# EAGLE board SGP30 Breakout-Panel (EAGLE 9.6.0), part 1 of 5
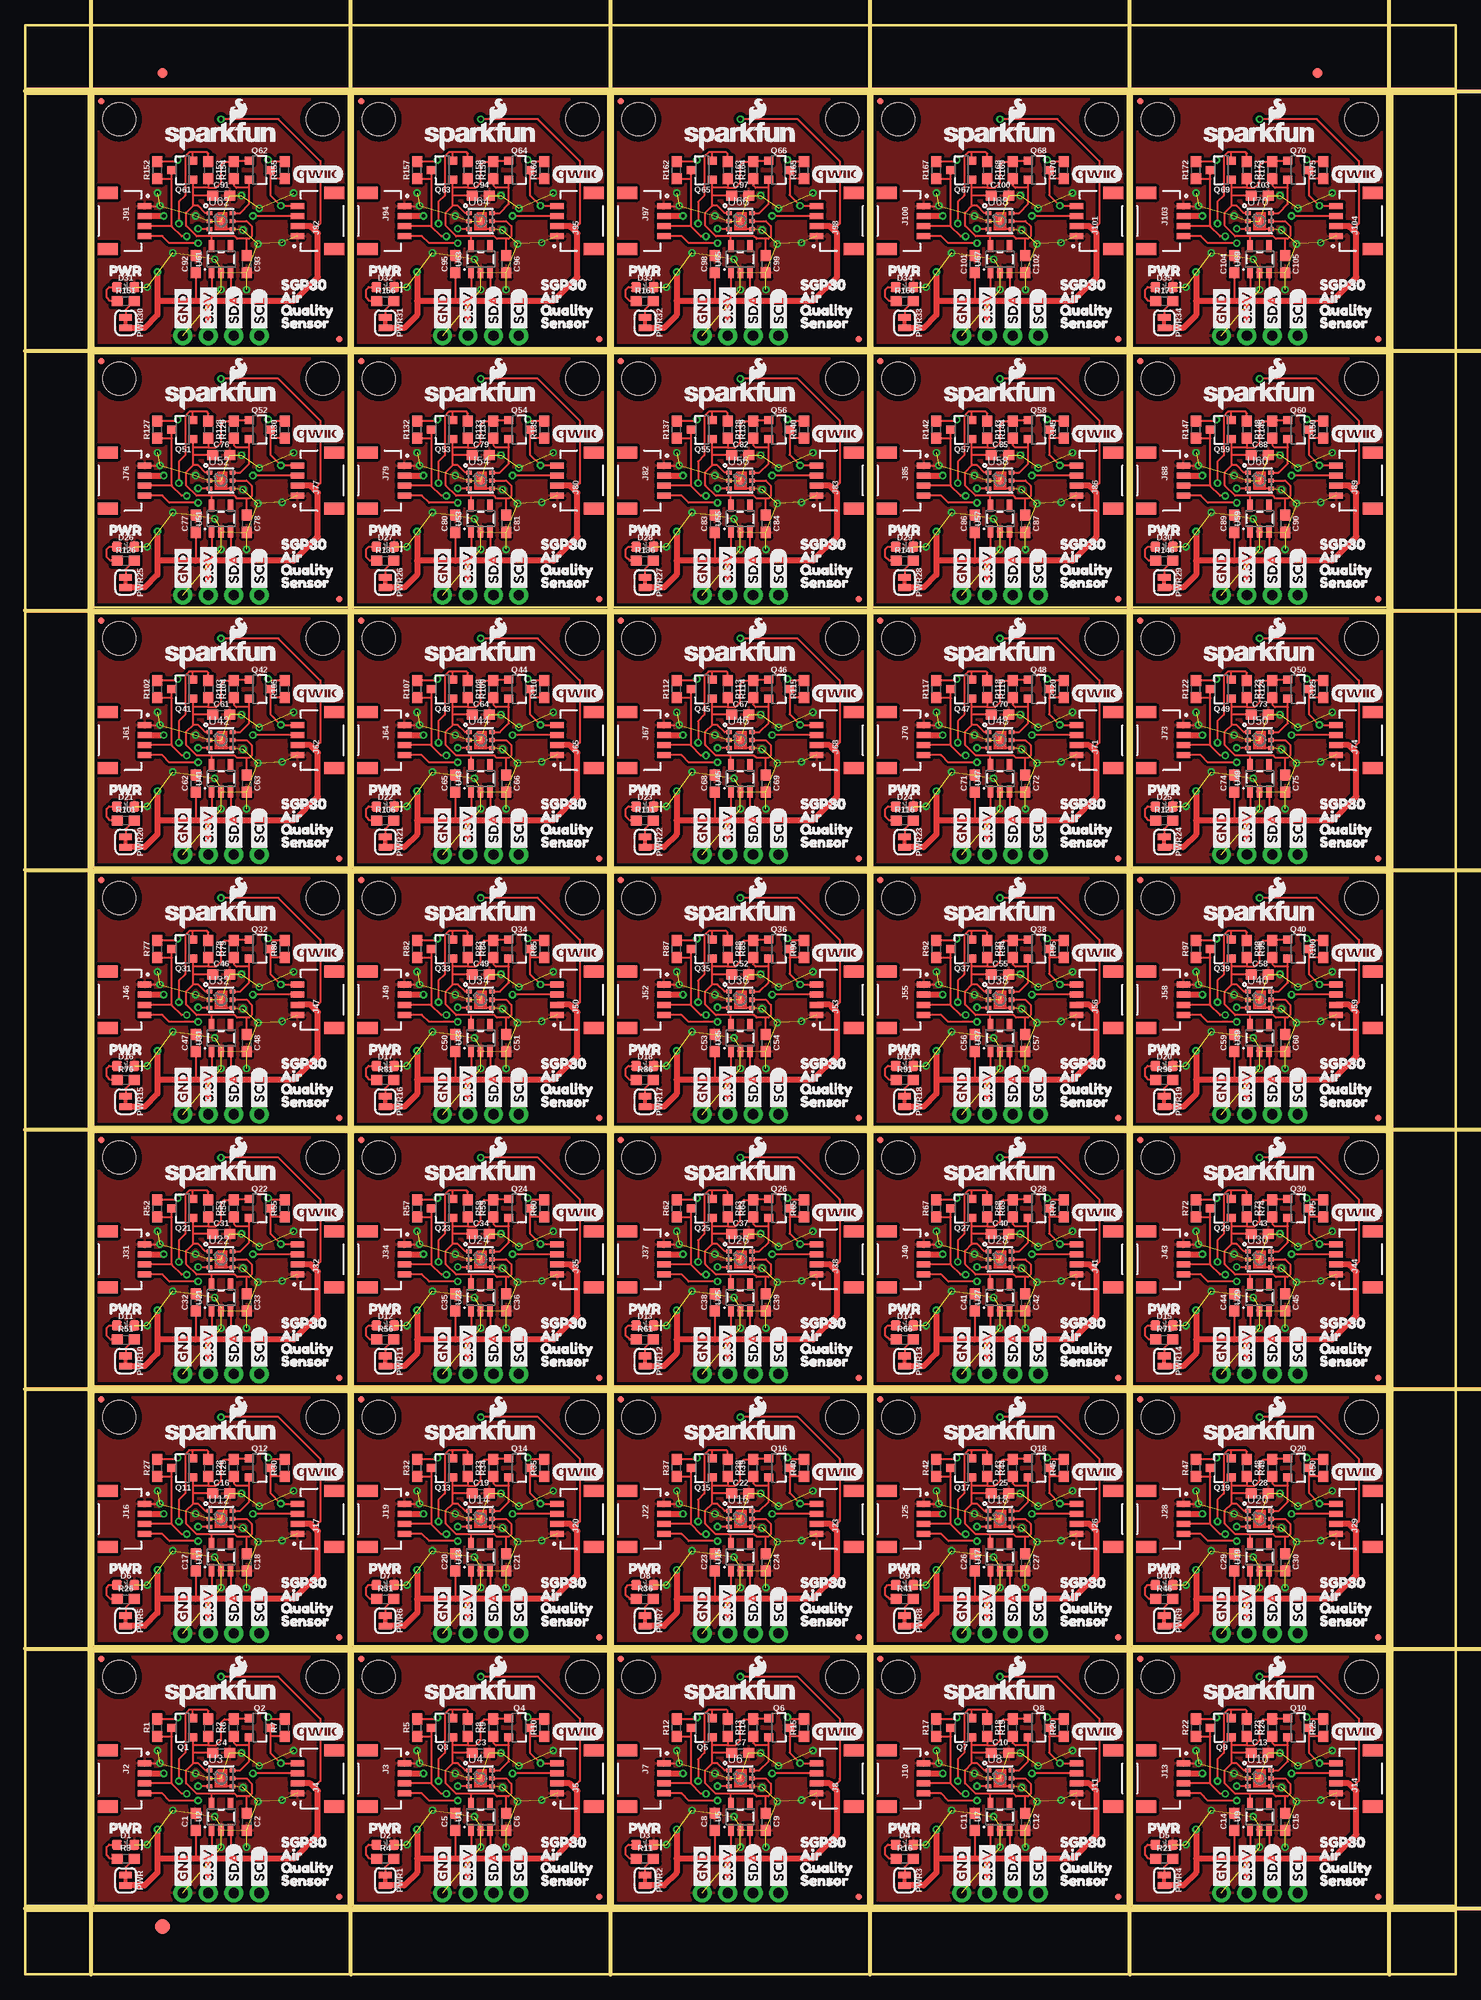
[diagram p0: board, top side]
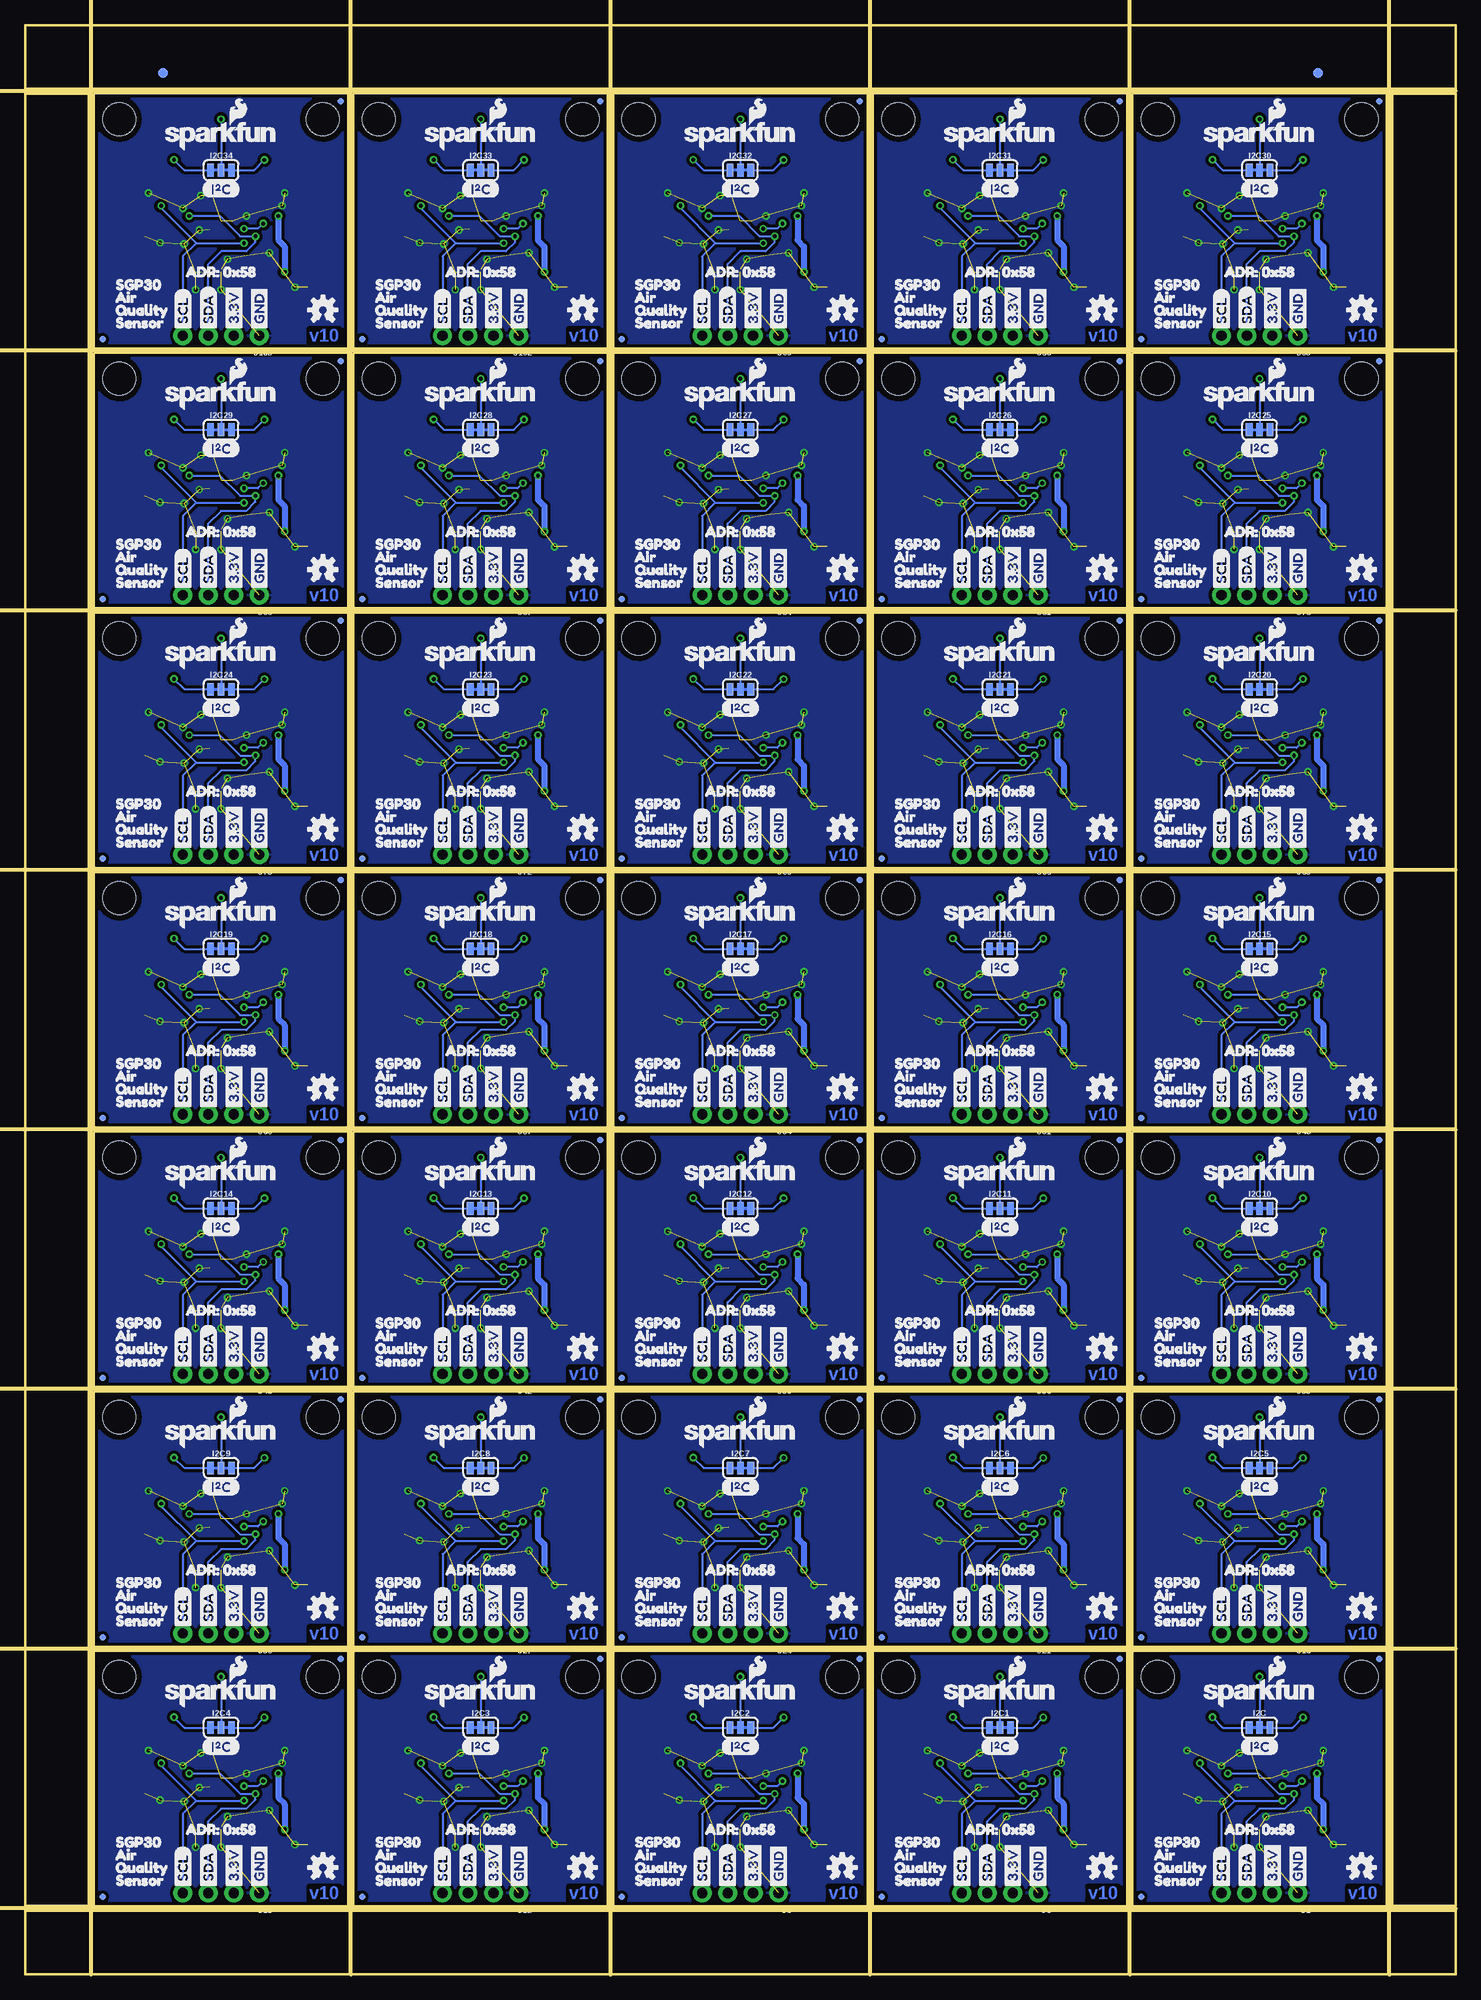
[diagram p1: board, bottom side, seen from below]

Size 142.75 x 194.56 mm. Coordinates in mm from the lower left corner, seen from the top.
Outline: 6.86,6.86 6.86,32.26 32.26,32.26 32.26,6.86 6.86,6.86
Outline: 32.77,6.86 32.77,32.26 58.17,32.26 58.17,6.86 32.77,6.86
Outline: 58.67,6.86 58.67,32.26 84.07,32.26 84.07,6.86 58.67,6.86
Outline: 84.58,6.86 84.58,32.26 109.98,32.26 109.98,6.86 84.58,6.86
Outline: 110.49,6.86 110.49,32.26 135.89,32.26 135.89,6.86 110.49,6.86
Outline: 6.86,32.77 6.86,58.17 32.26,58.17 32.26,32.77 6.86,32.77
Outline: 32.77,32.77 32.77,58.17 58.17,58.17 58.17,32.77 32.77,32.77
Outline: 58.67,32.77 58.67,58.17 84.07,58.17 84.07,32.77 58.67,32.77
Outline: 84.58,32.77 84.58,58.17 109.98,58.17 109.98,32.77 84.58,32.77
Outline: 110.49,32.77 110.49,58.17 135.89,58.17 135.89,32.77 110.49,32.77
Outline: 6.86,58.67 6.86,84.07 32.26,84.07 32.26,58.67 6.86,58.67
Outline: 32.77,58.67 32.77,84.07 58.17,84.07 58.17,58.67 32.77,58.67
Outline: 58.67,58.67 58.67,84.07 84.07,84.07 84.07,58.67 58.67,58.67
Outline: 84.58,58.67 84.58,84.07 109.98,84.07 109.98,58.67 84.58,58.67
Outline: 110.49,58.67 110.49,84.07 135.89,84.07 135.89,58.67 110.49,58.67
Outline: 6.86,84.58 6.86,109.98 32.26,109.98 32.26,84.58 6.86,84.58
Outline: 32.77,84.58 32.77,109.98 58.17,109.98 58.17,84.58 32.77,84.58
Outline: 58.67,84.58 58.67,109.98 84.07,109.98 84.07,84.58 58.67,84.58
Outline: 84.58,84.58 84.58,109.98 109.98,109.98 109.98,84.58 84.58,84.58
Outline: 110.49,84.58 110.49,109.98 135.89,109.98 135.89,84.58 110.49,84.58
Outline: 6.86,110.49 6.86,135.89 32.26,135.89 32.26,110.49 6.86,110.49
Outline: 32.77,110.49 32.77,135.89 58.17,135.89 58.17,110.49 32.77,110.49
Outline: 58.67,110.49 58.67,135.89 84.07,135.89 84.07,110.49 58.67,110.49
Outline: 84.58,110.49 84.58,135.89 109.98,135.89 109.98,110.49 84.58,110.49
Outline: 110.49,110.49 110.49,135.89 135.89,135.89 135.89,110.49 110.49,110.49
Outline: 6.86,136.4 6.86,161.8 32.26,161.8 32.26,136.4 6.86,136.4
Outline: 32.77,136.4 32.77,161.8 58.17,161.8 58.17,136.4 32.77,136.4
Outline: 58.67,136.4 58.67,161.8 84.07,161.8 84.07,136.4 58.67,136.4
Outline: 84.58,136.4 84.58,161.8 109.98,161.8 109.98,136.4 84.58,136.4
Outline: 110.49,136.4 110.49,161.8 135.89,161.8 135.89,136.4 110.49,136.4
Outline: 6.86,162.31 6.86,187.71 32.26,187.71 32.26,162.31 6.86,162.31
Outline: 32.77,162.31 32.77,187.71 58.17,187.71 58.17,162.31 32.77,162.31
Outline: 58.67,162.31 58.67,187.71 84.07,187.71 84.07,162.31 58.67,162.31
Outline: 84.58,162.31 84.58,187.71 109.98,187.71 109.98,162.31 84.58,162.31
Outline: 110.49,162.31 110.49,187.71 135.89,187.71 135.89,162.31 110.49,162.31
Outline: 0,6.35 142.75,6.35 142.75,0 0,0 0,6.35
Outline: 136.4,187.71 142.75,187.71 142.75,6.86 136.4,6.86 136.4,187.71
Outline: 0,194.56 142.75,194.56 142.75,188.21 0,188.21 0,194.56
Outline: 0,187.71 6.35,187.71 6.35,6.86 0,6.86 0,187.71
Copper layers (1*16): Top 0.035mm / dielectric 1.5mm / Bottom 0.035mm
Design rules "SGP30": minimum track width 7mil, minimum drill 15mil, track to track 7mil, track to pad 7mil, pad to pad 7mil, via to via 7mil, smd to smd 7mil, copper to edge 7mil, drill to drill 7mil, minimum pad ring 7mil, minimum via ring 7mil, stop-mask expansion 4mil, vias tented up to drill 25mil, thermal gap 10mil
Milling: 14 lines

## Footprints (pad centres in the part's own frame; a part is rotated, then mirrored left to right if it is on the bottom)
0603 = smd 1.1 x 1: 1 -0.85,0; 2 0.85,0
LED-0603 = smd 1 x 1: A -0.877,0; C 0.877,0
FIDUCIAL-1X2 = smd 1 x 1: 1 0,0
FIDUCIAL-1.5X3 = smd 1.5 x 1.5: 1 0,0
SMT-JUMPER_3_2-NC_TRACE_SILK = smd 0.66 x 1.27: 1 -1.041,0; 2 0,0; 3 1.041,0
1X04_NO_SILK = drill 1.016 pad 1.88: 1 0,0; 2 2.54,0; 3 5.08,0; 4 7.62,0
JST04_1MM_RA = smd 0.6 x 1.35: 1 -1.5,0; 2 -0.5,0; 3 0.5,0; 4 1.5,0 | smd 1.2 x 2: NC1 2.8,-3.675; NC2 -2.8,-3.675
MICRO-FIDUCIAL = smd 0.635 x 0.635: 1 0,0
STAND-OFF = hole 3.302: 0,0
SMT-JUMPER_2_NC_TRACE_SILK = smd 0.66 x 1.27: 1 -0.521,0; 2 0.521,0
SOT23-3 = smd 0.8 x 0.9: 1 -0.95,-1; 2 0.95,-1; 3 0,1.1
SOT23-5 = smd 0.55 x 1.2: 1 -0.95,-1.3; 2 0,-1.3; 3 0.95,-1.3; 4 0.95,1.3; 5 -0.95,1.3
SGP30 = smd 0.55 x 0.4: 1 -1.15,0.8; 2 -1.15,0; 3 -1.15,-0.8; 4 1.15,-0.8; 5 1.15,0; 6 1.15,0.8 | smd 0.305 x 0.61: DIEPAD 0,0

## Placement (x,y rotation side)
C1  1.0uF  [0603]  17.02,15.24 90 top
C2  1.0uF  [0603]  22.1,15.24 270 top
C3  0.1uF  [0603]  45.47,22.1 0 top
C4  0.1uF  [0603]  19.56,22.1 0 top
C5  1.0uF  [0603]  42.93,15.24 90 top
C6  1.0uF  [0603]  48.01,15.24 270 top
C7  0.1uF  [0603]  71.37,22.1 0 top
C8  1.0uF  [0603]  68.83,15.24 90 top
C9  1.0uF  [0603]  73.91,15.24 270 top
C10  0.1uF  [0603]  97.28,22.1 0 top
C11  1.0uF  [0603]  94.74,15.24 90 top
C12  1.0uF  [0603]  99.82,15.24 270 top
C13  0.1uF  [0603]  123.19,22.1 0 top
C14  1.0uF  [0603]  120.65,15.24 90 top
C15  1.0uF  [0603]  125.73,15.24 270 top
C16  0.1uF  [0603]  19.56,48.01 0 top
C17  1.0uF  [0603]  17.02,41.15 90 top
C18  1.0uF  [0603]  22.1,41.15 270 top
C19  0.1uF  [0603]  45.47,48.01 0 top
C20  1.0uF  [0603]  42.93,41.15 90 top
C21  1.0uF  [0603]  48.01,41.15 270 top
C22  0.1uF  [0603]  71.37,48.01 0 top
C23  1.0uF  [0603]  68.83,41.15 90 top
C24  1.0uF  [0603]  73.91,41.15 270 top
C25  0.1uF  [0603]  97.28,48.01 0 top
C26  1.0uF  [0603]  94.74,41.15 90 top
C27  1.0uF  [0603]  99.82,41.15 270 top
C28  0.1uF  [0603]  123.19,48.01 0 top
C29  1.0uF  [0603]  120.65,41.15 90 top
C30  1.0uF  [0603]  125.73,41.15 270 top
C31  0.1uF  [0603]  19.56,73.91 0 top
C32  1.0uF  [0603]  17.02,67.06 90 top
C33  1.0uF  [0603]  22.1,67.06 270 top
C34  0.1uF  [0603]  45.47,73.91 0 top
C35  1.0uF  [0603]  42.93,67.06 90 top
C36  1.0uF  [0603]  48.01,67.06 270 top
C37  0.1uF  [0603]  71.37,73.91 0 top
C38  1.0uF  [0603]  68.83,67.06 90 top
C39  1.0uF  [0603]  73.91,67.06 270 top
C40  0.1uF  [0603]  97.28,73.91 0 top
C41  1.0uF  [0603]  94.74,67.06 90 top
C42  1.0uF  [0603]  99.82,67.06 270 top
C43  0.1uF  [0603]  123.19,73.91 0 top
C44  1.0uF  [0603]  120.65,67.06 90 top
C45  1.0uF  [0603]  125.73,67.06 270 top
C46  0.1uF  [0603]  19.56,99.82 0 top
C47  1.0uF  [0603]  17.02,92.96 90 top
C48  1.0uF  [0603]  22.1,92.96 270 top
C49  0.1uF  [0603]  45.47,99.82 0 top
C50  1.0uF  [0603]  42.93,92.96 90 top
C51  1.0uF  [0603]  48.01,92.96 270 top
C52  0.1uF  [0603]  71.37,99.82 0 top
C53  1.0uF  [0603]  68.83,92.96 90 top
C54  1.0uF  [0603]  73.91,92.96 270 top
C55  0.1uF  [0603]  97.28,99.82 0 top
C56  1.0uF  [0603]  94.74,92.96 90 top
C57  1.0uF  [0603]  99.82,92.96 270 top
C58  0.1uF  [0603]  123.19,99.82 0 top
C59  1.0uF  [0603]  120.65,92.96 90 top
C60  1.0uF  [0603]  125.73,92.96 270 top
C61  0.1uF  [0603]  19.56,125.73 0 top
C62  1.0uF  [0603]  17.02,118.87 90 top
C63  1.0uF  [0603]  22.1,118.87 270 top
C64  0.1uF  [0603]  45.47,125.73 0 top
C65  1.0uF  [0603]  42.93,118.87 90 top
C66  1.0uF  [0603]  48.01,118.87 270 top
C67  0.1uF  [0603]  71.37,125.73 0 top
C68  1.0uF  [0603]  68.83,118.87 90 top
C69  1.0uF  [0603]  73.91,118.87 270 top
C70  0.1uF  [0603]  97.28,125.73 0 top
C71  1.0uF  [0603]  94.74,118.87 90 top
C72  1.0uF  [0603]  99.82,118.87 270 top
C73  0.1uF  [0603]  123.19,125.73 0 top
C74  1.0uF  [0603]  120.65,118.87 90 top
C75  1.0uF  [0603]  125.73,118.87 270 top
C76  0.1uF  [0603]  19.56,151.64 0 top
C77  1.0uF  [0603]  17.02,144.78 90 top
C78  1.0uF  [0603]  22.1,144.78 270 top
C79  0.1uF  [0603]  45.47,151.64 0 top
C80  1.0uF  [0603]  42.93,144.78 90 top
C81  1.0uF  [0603]  48.01,144.78 270 top
C82  0.1uF  [0603]  71.37,151.64 0 top
C83  1.0uF  [0603]  68.83,144.78 90 top
C84  1.0uF  [0603]  73.91,144.78 270 top
C85  0.1uF  [0603]  97.28,151.64 0 top
C86  1.0uF  [0603]  94.74,144.78 90 top
C87  1.0uF  [0603]  99.82,144.78 270 top
C88  0.1uF  [0603]  123.19,151.64 0 top
C89  1.0uF  [0603]  120.65,144.78 90 top
C90  1.0uF  [0603]  125.73,144.78 270 top
C91  0.1uF  [0603]  19.56,177.55 0 top
C92  1.0uF  [0603]  17.02,170.69 90 top
C93  1.0uF  [0603]  22.1,170.69 270 top
C94  0.1uF  [0603]  45.47,177.55 0 top
C95  1.0uF  [0603]  42.93,170.69 90 top
C96  1.0uF  [0603]  48.01,170.69 270 top
C97  0.1uF  [0603]  71.37,177.55 0 top
C98  1.0uF  [0603]  68.83,170.69 90 top
C99  1.0uF  [0603]  73.91,170.69 270 top
C100  0.1uF  [0603]  97.28,177.55 0 top
C101  1.0uF  [0603]  94.74,170.69 90 top
C102  1.0uF  [0603]  99.82,170.69 270 top
C103  0.1uF  [0603]  123.19,177.55 0 top
C104  1.0uF  [0603]  120.65,170.69 90 top
C105  1.0uF  [0603]  125.73,170.69 270 top
D1  RED  [LED-0603]  10.03,12.95 0 top
D2  RED  [LED-0603]  35.94,12.95 0 top
D3  RED  [LED-0603]  61.85,12.95 0 top
D4  RED  [LED-0603]  87.76,12.95 0 top
D5  RED  [LED-0603]  113.67,12.95 0 top
D6  RED  [LED-0603]  10.03,38.86 0 top
D7  RED  [LED-0603]  35.94,38.86 0 top
D8  RED  [LED-0603]  61.85,38.86 0 top
D9  RED  [LED-0603]  87.76,38.86 0 top
D10  RED  [LED-0603]  113.67,38.86 0 top
D11  RED  [LED-0603]  10.03,64.77 0 top
D12  RED  [LED-0603]  35.94,64.77 0 top
D13  RED  [LED-0603]  61.85,64.77 0 top
D14  RED  [LED-0603]  87.76,64.77 0 top
D15  RED  [LED-0603]  113.67,64.77 0 top
D16  RED  [LED-0603]  10.03,90.68 0 top
D17  RED  [LED-0603]  35.94,90.68 0 top
D18  RED  [LED-0603]  61.85,90.68 0 top
D19  RED  [LED-0603]  87.76,90.68 0 top
D20  RED  [LED-0603]  113.67,90.68 0 top
D21  RED  [LED-0603]  10.03,116.59 0 top
D22  RED  [LED-0603]  35.94,116.59 0 top
D23  RED  [LED-0603]  61.85,116.59 0 top
D24  RED  [LED-0603]  87.76,116.59 0 top
D25  RED  [LED-0603]  113.67,116.59 0 top
D26  RED  [LED-0603]  10.03,142.49 0 top
D27  RED  [LED-0603]  35.94,142.49 0 top
D28  RED  [LED-0603]  61.85,142.49 0 top
D29  RED  [LED-0603]  87.76,142.49 0 top
D30  RED  [LED-0603]  113.67,142.49 0 top
D31  RED  [LED-0603]  10.03,168.4 0 top
D32  RED  [LED-0603]  35.94,168.4 0 top
D33  RED  [LED-0603]  61.85,168.4 0 top
D34  RED  [LED-0603]  87.76,168.4 0 top
D35  RED  [LED-0603]  113.67,168.4 0 top
E$1  [FIDUCIAL-1X2]  13.72,189.8 0 top
E$2  [FIDUCIAL-1X2]  13.72,189.8 0 bottom
E$3  [FIDUCIAL-1X2]  128.97,189.8 0 top
E$4  [FIDUCIAL-1X2]  128.97,189.8 0 bottom
E$5  [FIDUCIAL-1.5X3]  13.72,4.76 0 top
I2C  JUMPER-SMT_3_2-NC_TRACE_SILK  [SMT-JUMPER_3_2-NC_TRACE_SILK]  19.56,24.64 0 bottom
I2C1  JUMPER-SMT_3_2-NC_TRACE_SILK  [SMT-JUMPER_3_2-NC_TRACE_SILK]  45.47,24.64 0 bottom
I2C2  JUMPER-SMT_3_2-NC_TRACE_SILK  [SMT-JUMPER_3_2-NC_TRACE_SILK]  71.37,24.64 0 bottom
I2C3  JUMPER-SMT_3_2-NC_TRACE_SILK  [SMT-JUMPER_3_2-NC_TRACE_SILK]  97.28,24.64 0 bottom
I2C4  JUMPER-SMT_3_2-NC_TRACE_SILK  [SMT-JUMPER_3_2-NC_TRACE_SILK]  123.19,24.64 0 bottom
I2C5  JUMPER-SMT_3_2-NC_TRACE_SILK  [SMT-JUMPER_3_2-NC_TRACE_SILK]  19.56,50.55 0 bottom
I2C6  JUMPER-SMT_3_2-NC_TRACE_SILK  [SMT-JUMPER_3_2-NC_TRACE_SILK]  45.47,50.55 0 bottom
I2C7  JUMPER-SMT_3_2-NC_TRACE_SILK  [SMT-JUMPER_3_2-NC_TRACE_SILK]  71.37,50.55 0 bottom
I2C8  JUMPER-SMT_3_2-NC_TRACE_SILK  [SMT-JUMPER_3_2-NC_TRACE_SILK]  97.28,50.55 0 bottom
I2C9  JUMPER-SMT_3_2-NC_TRACE_SILK  [SMT-JUMPER_3_2-NC_TRACE_SILK]  123.19,50.55 0 bottom
I2C10  JUMPER-SMT_3_2-NC_TRACE_SILK  [SMT-JUMPER_3_2-NC_TRACE_SILK]  19.56,76.45 0 bottom
I2C11  JUMPER-SMT_3_2-NC_TRACE_SILK  [SMT-JUMPER_3_2-NC_TRACE_SILK]  45.47,76.45 0 bottom
I2C12  JUMPER-SMT_3_2-NC_TRACE_SILK  [SMT-JUMPER_3_2-NC_TRACE_SILK]  71.37,76.45 0 bottom
I2C13  JUMPER-SMT_3_2-NC_TRACE_SILK  [SMT-JUMPER_3_2-NC_TRACE_SILK]  97.28,76.45 0 bottom
I2C14  JUMPER-SMT_3_2-NC_TRACE_SILK  [SMT-JUMPER_3_2-NC_TRACE_SILK]  123.19,76.45 0 bottom
I2C15  JUMPER-SMT_3_2-NC_TRACE_SILK  [SMT-JUMPER_3_2-NC_TRACE_SILK]  19.56,102.36 0 bottom
I2C16  JUMPER-SMT_3_2-NC_TRACE_SILK  [SMT-JUMPER_3_2-NC_TRACE_SILK]  45.47,102.36 0 bottom
I2C17  JUMPER-SMT_3_2-NC_TRACE_SILK  [SMT-JUMPER_3_2-NC_TRACE_SILK]  71.37,102.36 0 bottom
I2C18  JUMPER-SMT_3_2-NC_TRACE_SILK  [SMT-JUMPER_3_2-NC_TRACE_SILK]  97.28,102.36 0 bottom
I2C19  JUMPER-SMT_3_2-NC_TRACE_SILK  [SMT-JUMPER_3_2-NC_TRACE_SILK]  123.19,102.36 0 bottom
I2C20  JUMPER-SMT_3_2-NC_TRACE_SILK  [SMT-JUMPER_3_2-NC_TRACE_SILK]  19.56,128.27 0 bottom
I2C21  JUMPER-SMT_3_2-NC_TRACE_SILK  [SMT-JUMPER_3_2-NC_TRACE_SILK]  45.47,128.27 0 bottom
I2C22  JUMPER-SMT_3_2-NC_TRACE_SILK  [SMT-JUMPER_3_2-NC_TRACE_SILK]  71.37,128.27 0 bottom
I2C23  JUMPER-SMT_3_2-NC_TRACE_SILK  [SMT-JUMPER_3_2-NC_TRACE_SILK]  97.28,128.27 0 bottom
I2C24  JUMPER-SMT_3_2-NC_TRACE_SILK  [SMT-JUMPER_3_2-NC_TRACE_SILK]  123.19,128.27 0 bottom
I2C25  JUMPER-SMT_3_2-NC_TRACE_SILK  [SMT-JUMPER_3_2-NC_TRACE_SILK]  19.56,154.18 0 bottom
I2C26  JUMPER-SMT_3_2-NC_TRACE_SILK  [SMT-JUMPER_3_2-NC_TRACE_SILK]  45.47,154.18 0 bottom
I2C27  JUMPER-SMT_3_2-NC_TRACE_SILK  [SMT-JUMPER_3_2-NC_TRACE_SILK]  71.37,154.18 0 bottom
I2C28  JUMPER-SMT_3_2-NC_TRACE_SILK  [SMT-JUMPER_3_2-NC_TRACE_SILK]  97.28,154.18 0 bottom
I2C29  JUMPER-SMT_3_2-NC_TRACE_SILK  [SMT-JUMPER_3_2-NC_TRACE_SILK]  123.19,154.18 0 bottom
I2C30  JUMPER-SMT_3_2-NC_TRACE_SILK  [SMT-JUMPER_3_2-NC_TRACE_SILK]  19.56,180.09 0 bottom
I2C31  JUMPER-SMT_3_2-NC_TRACE_SILK  [SMT-JUMPER_3_2-NC_TRACE_SILK]  45.47,180.09 0 bottom
I2C32  JUMPER-SMT_3_2-NC_TRACE_SILK  [SMT-JUMPER_3_2-NC_TRACE_SILK]  71.37,180.09 0 bottom
I2C33  JUMPER-SMT_3_2-NC_TRACE_SILK  [SMT-JUMPER_3_2-NC_TRACE_SILK]  97.28,180.09 0 bottom
I2C34  JUMPER-SMT_3_2-NC_TRACE_SILK  [SMT-JUMPER_3_2-NC_TRACE_SILK]  123.19,180.09 0 bottom
J1  [1X04_NO_SILK]  15.75,8.13 180 bottom
J2  QWIIC_RIGHT_ANGLE  [JST04_1MM_RA]  11.94,19.56 270 top
J3  QWIIC_RIGHT_ANGLE  [JST04_1MM_RA]  37.85,19.56 270 top
J4  QWIIC_RIGHT_ANGLE  [JST04_1MM_RA]  27.18,19.56 90 top
J5  QWIIC_RIGHT_ANGLE  [JST04_1MM_RA]  53.09,19.56 90 top
J6  [1X04_NO_SILK]  41.66,8.13 180 bottom
J7  QWIIC_RIGHT_ANGLE  [JST04_1MM_RA]  63.75,19.56 270 top
J8  QWIIC_RIGHT_ANGLE  [JST04_1MM_RA]  78.99,19.56 90 top
J9  [1X04_NO_SILK]  67.56,8.13 180 bottom
J10  QWIIC_RIGHT_ANGLE  [JST04_1MM_RA]  89.66,19.56 270 top
J11  QWIIC_RIGHT_ANGLE  [JST04_1MM_RA]  104.9,19.56 90 top
J12  [1X04_NO_SILK]  93.47,8.13 180 bottom
J13  QWIIC_RIGHT_ANGLE  [JST04_1MM_RA]  115.57,19.56 270 top
J14  QWIIC_RIGHT_ANGLE  [JST04_1MM_RA]  130.81,19.56 90 top
J15  [1X04_NO_SILK]  119.38,8.13 180 bottom
J16  QWIIC_RIGHT_ANGLE  [JST04_1MM_RA]  11.94,45.47 270 top
J17  QWIIC_RIGHT_ANGLE  [JST04_1MM_RA]  27.18,45.47 90 top
J18  [1X04_NO_SILK]  15.75,34.04 180 bottom
J19  QWIIC_RIGHT_ANGLE  [JST04_1MM_RA]  37.85,45.47 270 top
J20  QWIIC_RIGHT_ANGLE  [JST04_1MM_RA]  53.09,45.47 90 top
J21  [1X04_NO_SILK]  41.66,34.04 180 bottom
J22  QWIIC_RIGHT_ANGLE  [JST04_1MM_RA]  63.75,45.47 270 top
J23  QWIIC_RIGHT_ANGLE  [JST04_1MM_RA]  78.99,45.47 90 top
J24  [1X04_NO_SILK]  67.56,34.04 180 bottom
J25  QWIIC_RIGHT_ANGLE  [JST04_1MM_RA]  89.66,45.47 270 top
J26  QWIIC_RIGHT_ANGLE  [JST04_1MM_RA]  104.9,45.47 90 top
J27  [1X04_NO_SILK]  93.47,34.04 180 bottom
J28  QWIIC_RIGHT_ANGLE  [JST04_1MM_RA]  115.57,45.47 270 top
J29  QWIIC_RIGHT_ANGLE  [JST04_1MM_RA]  130.81,45.47 90 top
J30  [1X04_NO_SILK]  119.38,34.04 180 bottom
J31  QWIIC_RIGHT_ANGLE  [JST04_1MM_RA]  11.94,71.37 270 top
J32  QWIIC_RIGHT_ANGLE  [JST04_1MM_RA]  27.18,71.37 90 top
J33  [1X04_NO_SILK]  15.75,59.94 180 bottom
J34  QWIIC_RIGHT_ANGLE  [JST04_1MM_RA]  37.85,71.37 270 top
J35  QWIIC_RIGHT_ANGLE  [JST04_1MM_RA]  53.09,71.37 90 top
J36  [1X04_NO_SILK]  41.66,59.94 180 bottom
J37  QWIIC_RIGHT_ANGLE  [JST04_1MM_RA]  63.75,71.37 270 top
J38  QWIIC_RIGHT_ANGLE  [JST04_1MM_RA]  78.99,71.37 90 top
J39  [1X04_NO_SILK]  67.56,59.94 180 bottom
J40  QWIIC_RIGHT_ANGLE  [JST04_1MM_RA]  89.66,71.37 270 top
J41  QWIIC_RIGHT_ANGLE  [JST04_1MM_RA]  104.9,71.37 90 top
J42  [1X04_NO_SILK]  93.47,59.94 180 bottom
J43  QWIIC_RIGHT_ANGLE  [JST04_1MM_RA]  115.57,71.37 270 top
J44  QWIIC_RIGHT_ANGLE  [JST04_1MM_RA]  130.81,71.37 90 top
J45  [1X04_NO_SILK]  119.38,59.94 180 bottom
J46  QWIIC_RIGHT_ANGLE  [JST04_1MM_RA]  11.94,97.28 270 top
J47  QWIIC_RIGHT_ANGLE  [JST04_1MM_RA]  27.18,97.28 90 top
J48  [1X04_NO_SILK]  15.75,85.85 180 bottom
J49  QWIIC_RIGHT_ANGLE  [JST04_1MM_RA]  37.85,97.28 270 top
J50  QWIIC_RIGHT_ANGLE  [JST04_1MM_RA]  53.09,97.28 90 top
J51  [1X04_NO_SILK]  41.66,85.85 180 bottom
J52  QWIIC_RIGHT_ANGLE  [JST04_1MM_RA]  63.75,97.28 270 top
J53  QWIIC_RIGHT_ANGLE  [JST04_1MM_RA]  78.99,97.28 90 top
J54  [1X04_NO_SILK]  67.56,85.85 180 bottom
J55  QWIIC_RIGHT_ANGLE  [JST04_1MM_RA]  89.66,97.28 270 top
J56  QWIIC_RIGHT_ANGLE  [JST04_1MM_RA]  104.9,97.28 90 top
J57  [1X04_NO_SILK]  93.47,85.85 180 bottom
J58  QWIIC_RIGHT_ANGLE  [JST04_1MM_RA]  115.57,97.28 270 top
J59  QWIIC_RIGHT_ANGLE  [JST04_1MM_RA]  130.81,97.28 90 top
J60  [1X04_NO_SILK]  119.38,85.85 180 bottom
J61  QWIIC_RIGHT_ANGLE  [JST04_1MM_RA]  11.94,123.19 270 top
J62  QWIIC_RIGHT_ANGLE  [JST04_1MM_RA]  27.18,123.19 90 top
J63  [1X04_NO_SILK]  15.75,111.76 180 bottom
J64  QWIIC_RIGHT_ANGLE  [JST04_1MM_RA]  37.85,123.19 270 top
J65  QWIIC_RIGHT_ANGLE  [JST04_1MM_RA]  53.09,123.19 90 top
J66  [1X04_NO_SILK]  41.66,111.76 180 bottom
J67  QWIIC_RIGHT_ANGLE  [JST04_1MM_RA]  63.75,123.19 270 top
J68  QWIIC_RIGHT_ANGLE  [JST04_1MM_RA]  78.99,123.19 90 top
J69  [1X04_NO_SILK]  67.56,111.76 180 bottom
J70  QWIIC_RIGHT_ANGLE  [JST04_1MM_RA]  89.66,123.19 270 top
J71  QWIIC_RIGHT_ANGLE  [JST04_1MM_RA]  104.9,123.19 90 top
J72  [1X04_NO_SILK]  93.47,111.76 180 bottom
J73  QWIIC_RIGHT_ANGLE  [JST04_1MM_RA]  115.57,123.19 270 top
J74  QWIIC_RIGHT_ANGLE  [JST04_1MM_RA]  130.81,123.19 90 top
J75  [1X04_NO_SILK]  119.38,111.76 180 bottom
J76  QWIIC_RIGHT_ANGLE  [JST04_1MM_RA]  11.94,149.1 270 top
J77  QWIIC_RIGHT_ANGLE  [JST04_1MM_RA]  27.18,149.1 90 top
J78  [1X04_NO_SILK]  15.75,137.67 180 bottom
J79  QWIIC_RIGHT_ANGLE  [JST04_1MM_RA]  37.85,149.1 270 top
J80  QWIIC_RIGHT_ANGLE  [JST04_1MM_RA]  53.09,149.1 90 top
J81  [1X04_NO_SILK]  41.66,137.67 180 bottom
J82  QWIIC_RIGHT_ANGLE  [JST04_1MM_RA]  63.75,149.1 270 top
J83  QWIIC_RIGHT_ANGLE  [JST04_1MM_RA]  78.99,149.1 90 top
J84  [1X04_NO_SILK]  67.56,137.67 180 bottom
J85  QWIIC_RIGHT_ANGLE  [JST04_1MM_RA]  89.66,149.1 270 top
J86  QWIIC_RIGHT_ANGLE  [JST04_1MM_RA]  104.9,149.1 90 top
J87  [1X04_NO_SILK]  93.47,137.67 180 bottom
J88  QWIIC_RIGHT_ANGLE  [JST04_1MM_RA]  115.57,149.1 270 top
J89  QWIIC_RIGHT_ANGLE  [JST04_1MM_RA]  130.81,149.1 90 top
J90  [1X04_NO_SILK]  119.38,137.67 180 bottom
J91  QWIIC_RIGHT_ANGLE  [JST04_1MM_RA]  11.94,175.01 270 top
J92  QWIIC_RIGHT_ANGLE  [JST04_1MM_RA]  27.18,175.01 90 top
J93  [1X04_NO_SILK]  15.75,163.58 180 bottom
J94  QWIIC_RIGHT_ANGLE  [JST04_1MM_RA]  37.85,175.01 270 top
J95  QWIIC_RIGHT_ANGLE  [JST04_1MM_RA]  53.09,175.01 90 top
J96  [1X04_NO_SILK]  41.66,163.58 180 bottom
J97  QWIIC_RIGHT_ANGLE  [JST04_1MM_RA]  63.75,175.01 270 top
J98  QWIIC_RIGHT_ANGLE  [JST04_1MM_RA]  78.99,175.01 90 top
J99  [1X04_NO_SILK]  67.56,163.58 180 bottom
J100  QWIIC_RIGHT_ANGLE  [JST04_1MM_RA]  89.66,175.01 270 top
J101  QWIIC_RIGHT_ANGLE  [JST04_1MM_RA]  104.9,175.01 90 top
J102  [1X04_NO_SILK]  93.47,163.58 180 bottom
J103  QWIIC_RIGHT_ANGLE  [JST04_1MM_RA]  115.57,175.01 270 top
J104  QWIIC_RIGHT_ANGLE  [JST04_1MM_RA]  130.81,175.01 90 top
J105  [1X04_NO_SILK]  119.38,163.58 180 bottom
JP1  FIDUCIALUFIDUCIAL  [MICRO-FIDUCIAL]  7.62,31.5 0 bottom
JP2  FIDUCIALUFIDUCIAL  [MICRO-FIDUCIAL]  31.37,7.75 0 top
JP3  STAND-OFF  [STAND-OFF]  9.4,29.72 0 top
JP4  STAND-OFF  [STAND-OFF]  29.72,29.72 0 top
JP5  FIDUCIALUFIDUCIAL  [MICRO-FIDUCIAL]  31.37,7.75 0 bottom
JP6  FIDUCIALUFIDUCIAL  [MICRO-FIDUCIAL]  7.62,31.5 0 top
JP7  STAND-OFF  [STAND-OFF]  35.31,29.72 0 top
JP8  STAND-OFF  [STAND-OFF]  55.63,29.72 0 top
JP9  FIDUCIALUFIDUCIAL  [MICRO-FIDUCIAL]  57.28,7.75 0 top
JP10  FIDUCIALUFIDUCIAL  [MICRO-FIDUCIAL]  33.53,31.5 0 top
JP11  FIDUCIALUFIDUCIAL  [MICRO-FIDUCIAL]  33.53,31.5 0 bottom
JP12  FIDUCIALUFIDUCIAL  [MICRO-FIDUCIAL]  57.28,7.75 0 bottom
JP13  STAND-OFF  [STAND-OFF]  61.21,29.72 0 top
JP14  STAND-OFF  [STAND-OFF]  81.53,29.72 0 top
JP15  FIDUCIALUFIDUCIAL  [MICRO-FIDUCIAL]  83.19,7.75 0 top
JP16  FIDUCIALUFIDUCIAL  [MICRO-FIDUCIAL]  59.44,31.5 0 top
JP17  FIDUCIALUFIDUCIAL  [MICRO-FIDUCIAL]  59.44,31.5 0 bottom
JP18  FIDUCIALUFIDUCIAL  [MICRO-FIDUCIAL]  83.19,7.75 0 bottom
JP19  STAND-OFF  [STAND-OFF]  87.12,29.72 0 top
JP20  STAND-OFF  [STAND-OFF]  107.44,29.72 0 top
JP21  FIDUCIALUFIDUCIAL  [MICRO-FIDUCIAL]  109.09,7.75 0 top
JP22  FIDUCIALUFIDUCIAL  [MICRO-FIDUCIAL]  85.34,31.5 0 top
JP23  FIDUCIALUFIDUCIAL  [MICRO-FIDUCIAL]  85.34,31.5 0 bottom
JP24  FIDUCIALUFIDUCIAL  [MICRO-FIDUCIAL]  109.09,7.75 0 bottom
JP25  STAND-OFF  [STAND-OFF]  113.03,29.72 0 top
JP26  STAND-OFF  [STAND-OFF]  133.35,29.72 0 top
JP27  FIDUCIALUFIDUCIAL  [MICRO-FIDUCIAL]  135,7.75 0 top
JP28  FIDUCIALUFIDUCIAL  [MICRO-FIDUCIAL]  111.25,31.5 0 top
JP29  FIDUCIALUFIDUCIAL  [MICRO-FIDUCIAL]  111.25,31.5 0 bottom
JP30  FIDUCIALUFIDUCIAL  [MICRO-FIDUCIAL]  135,7.75 0 bottom
JP31  STAND-OFF  [STAND-OFF]  9.4,55.63 0 top
JP32  STAND-OFF  [STAND-OFF]  29.72,55.63 0 top
JP33  FIDUCIALUFIDUCIAL  [MICRO-FIDUCIAL]  31.37,33.66 0 top
JP34  FIDUCIALUFIDUCIAL  [MICRO-FIDUCIAL]  7.62,57.4 0 top
JP35  FIDUCIALUFIDUCIAL  [MICRO-FIDUCIAL]  7.62,57.4 0 bottom
JP36  FIDUCIALUFIDUCIAL  [MICRO-FIDUCIAL]  31.37,33.66 0 bottom
JP37  STAND-OFF  [STAND-OFF]  35.31,55.63 0 top
JP38  STAND-OFF  [STAND-OFF]  55.63,55.63 0 top
JP39  FIDUCIALUFIDUCIAL  [MICRO-FIDUCIAL]  57.28,33.66 0 top
JP40  FIDUCIALUFIDUCIAL  [MICRO-FIDUCIAL]  33.53,57.4 0 top
JP41  FIDUCIALUFIDUCIAL  [MICRO-FIDUCIAL]  33.53,57.4 0 bottom
JP42  FIDUCIALUFIDUCIAL  [MICRO-FIDUCIAL]  57.28,33.66 0 bottom
JP43  STAND-OFF  [STAND-OFF]  61.21,55.63 0 top
JP44  STAND-OFF  [STAND-OFF]  81.53,55.63 0 top
JP45  FIDUCIALUFIDUCIAL  [MICRO-FIDUCIAL]  83.19,33.66 0 top
JP46  FIDUCIALUFIDUCIAL  [MICRO-FIDUCIAL]  59.44,57.4 0 top
JP47  FIDUCIALUFIDUCIAL  [MICRO-FIDUCIAL]  59.44,57.4 0 bottom
JP48  FIDUCIALUFIDUCIAL  [MICRO-FIDUCIAL]  83.19,33.66 0 bottom
JP49  STAND-OFF  [STAND-OFF]  87.12,55.63 0 top
JP50  STAND-OFF  [STAND-OFF]  107.44,55.63 0 top
JP51  FIDUCIALUFIDUCIAL  [MICRO-FIDUCIAL]  109.09,33.66 0 top
JP52  FIDUCIALUFIDUCIAL  [MICRO-FIDUCIAL]  85.34,57.4 0 top
JP53  FIDUCIALUFIDUCIAL  [MICRO-FIDUCIAL]  85.34,57.4 0 bottom
JP54  FIDUCIALUFIDUCIAL  [MICRO-FIDUCIAL]  109.09,33.66 0 bottom
JP55  STAND-OFF  [STAND-OFF]  113.03,55.63 0 top
JP56  STAND-OFF  [STAND-OFF]  133.35,55.63 0 top
JP57  FIDUCIALUFIDUCIAL  [MICRO-FIDUCIAL]  135,33.66 0 top
JP58  FIDUCIALUFIDUCIAL  [MICRO-FIDUCIAL]  111.25,57.4 0 top
JP59  FIDUCIALUFIDUCIAL  [MICRO-FIDUCIAL]  111.25,57.4 0 bottom
JP60  FIDUCIALUFIDUCIAL  [MICRO-FIDUCIAL]  135,33.66 0 bottom
JP61  STAND-OFF  [STAND-OFF]  9.4,81.53 0 top
JP62  STAND-OFF  [STAND-OFF]  29.72,81.53 0 top
JP63  FIDUCIALUFIDUCIAL  [MICRO-FIDUCIAL]  31.37,59.56 0 top
JP64  FIDUCIALUFIDUCIAL  [MICRO-FIDUCIAL]  7.62,83.31 0 top
JP65  FIDUCIALUFIDUCIAL  [MICRO-FIDUCIAL]  7.62,83.31 0 bottom
JP66  FIDUCIALUFIDUCIAL  [MICRO-FIDUCIAL]  31.37,59.56 0 bottom
JP67  STAND-OFF  [STAND-OFF]  35.31,81.53 0 top
JP68  STAND-OFF  [STAND-OFF]  55.63,81.53 0 top
JP69  FIDUCIALUFIDUCIAL  [MICRO-FIDUCIAL]  57.28,59.56 0 top
JP70  FIDUCIALUFIDUCIAL  [MICRO-FIDUCIAL]  33.53,83.31 0 top
JP71  FIDUCIALUFIDUCIAL  [MICRO-FIDUCIAL]  33.53,83.31 0 bottom
JP72  FIDUCIALUFIDUCIAL  [MICRO-FIDUCIAL]  57.28,59.56 0 bottom
JP73  STAND-OFF  [STAND-OFF]  61.21,81.53 0 top
JP74  STAND-OFF  [STAND-OFF]  81.53,81.53 0 top
JP75  FIDUCIALUFIDUCIAL  [MICRO-FIDUCIAL]  83.19,59.56 0 top
JP76  FIDUCIALUFIDUCIAL  [MICRO-FIDUCIAL]  59.44,83.31 0 top
JP77  FIDUCIALUFIDUCIAL  [MICRO-FIDUCIAL]  59.44,83.31 0 bottom
JP78  FIDUCIALUFIDUCIAL  [MICRO-FIDUCIAL]  83.19,59.56 0 bottom
JP79  STAND-OFF  [STAND-OFF]  87.12,81.53 0 top
JP80  STAND-OFF  [STAND-OFF]  107.44,81.53 0 top
JP81  FIDUCIALUFIDUCIAL  [MICRO-FIDUCIAL]  109.09,59.56 0 top
JP82  FIDUCIALUFIDUCIAL  [MICRO-FIDUCIAL]  85.34,83.31 0 top
JP83  FIDUCIALUFIDUCIAL  [MICRO-FIDUCIAL]  85.34,83.31 0 bottom
JP84  FIDUCIALUFIDUCIAL  [MICRO-FIDUCIAL]  109.09,59.56 0 bottom
JP85  STAND-OFF  [STAND-OFF]  113.03,81.53 0 top
JP86  STAND-OFF  [STAND-OFF]  133.35,81.53 0 top
JP87  FIDUCIALUFIDUCIAL  [MICRO-FIDUCIAL]  135,59.56 0 top
JP88  FIDUCIALUFIDUCIAL  [MICRO-FIDUCIAL]  111.25,83.31 0 top
JP89  FIDUCIALUFIDUCIAL  [MICRO-FIDUCIAL]  111.25,83.31 0 bottom
JP90  FIDUCIALUFIDUCIAL  [MICRO-FIDUCIAL]  135,59.56 0 bottom
JP91  STAND-OFF  [STAND-OFF]  9.4,107.44 0 top
JP92  STAND-OFF  [STAND-OFF]  29.72,107.44 0 top
JP93  FIDUCIALUFIDUCIAL  [MICRO-FIDUCIAL]  31.37,85.47 0 top
JP94  FIDUCIALUFIDUCIAL  [MICRO-FIDUCIAL]  7.62,109.22 0 top
JP95  FIDUCIALUFIDUCIAL  [MICRO-FIDUCIAL]  7.62,109.22 0 bottom
JP96  FIDUCIALUFIDUCIAL  [MICRO-FIDUCIAL]  31.37,85.47 0 bottom
JP97  STAND-OFF  [STAND-OFF]  35.31,107.44 0 top
JP98  STAND-OFF  [STAND-OFF]  55.63,107.44 0 top
JP99  FIDUCIALUFIDUCIAL  [MICRO-FIDUCIAL]  57.28,85.47 0 top
JP100  FIDUCIALUFIDUCIAL  [MICRO-FIDUCIAL]  33.53,109.22 0 top
JP101  FIDUCIALUFIDUCIAL  [MICRO-FIDUCIAL]  33.53,109.22 0 bottom
JP102  FIDUCIALUFIDUCIAL  [MICRO-FIDUCIAL]  57.28,85.47 0 bottom
JP103  STAND-OFF  [STAND-OFF]  61.21,107.44 0 top
JP104  STAND-OFF  [STAND-OFF]  81.53,107.44 0 top
JP105  FIDUCIALUFIDUCIAL  [MICRO-FIDUCIAL]  83.19,85.47 0 top
JP106  FIDUCIALUFIDUCIAL  [MICRO-FIDUCIAL]  59.44,109.22 0 top
JP107  FIDUCIALUFIDUCIAL  [MICRO-FIDUCIAL]  59.44,109.22 0 bottom
JP108  FIDUCIALUFIDUCIAL  [MICRO-FIDUCIAL]  83.19,85.47 0 bottom
JP109  STAND-OFF  [STAND-OFF]  87.12,107.44 0 top
JP110  STAND-OFF  [STAND-OFF]  107.44,107.44 0 top
JP111  FIDUCIALUFIDUCIAL  [MICRO-FIDUCIAL]  109.09,85.47 0 top
JP112  FIDUCIALUFIDUCIAL  [MICRO-FIDUCIAL]  85.34,109.22 0 top
JP113  FIDUCIALUFIDUCIAL  [MICRO-FIDUCIAL]  85.34,109.22 0 bottom
JP114  FIDUCIALUFIDUCIAL  [MICRO-FIDUCIAL]  109.09,85.47 0 bottom
JP115  STAND-OFF  [STAND-OFF]  113.03,107.44 0 top
JP116  STAND-OFF  [STAND-OFF]  133.35,107.44 0 top
JP117  FIDUCIALUFIDUCIAL  [MICRO-FIDUCIAL]  135,85.47 0 top
JP118  FIDUCIALUFIDUCIAL  [MICRO-FIDUCIAL]  111.25,109.22 0 top
JP119  FIDUCIALUFIDUCIAL  [MICRO-FIDUCIAL]  111.25,109.22 0 bottom
JP120  FIDUCIALUFIDUCIAL  [MICRO-FIDUCIAL]  135,85.47 0 bottom
JP121  STAND-OFF  [STAND-OFF]  9.4,133.35 0 top
JP122  STAND-OFF  [STAND-OFF]  29.72,133.35 0 top
JP123  FIDUCIALUFIDUCIAL  [MICRO-FIDUCIAL]  31.37,111.38 0 top
JP124  FIDUCIALUFIDUCIAL  [MICRO-FIDUCIAL]  7.62,135.13 0 top
JP125  FIDUCIALUFIDUCIAL  [MICRO-FIDUCIAL]  7.62,135.13 0 bottom
JP126  FIDUCIALUFIDUCIAL  [MICRO-FIDUCIAL]  31.37,111.38 0 bottom
JP127  STAND-OFF  [STAND-OFF]  35.31,133.35 0 top
JP128  STAND-OFF  [STAND-OFF]  55.63,133.35 0 top
JP129  FIDUCIALUFIDUCIAL  [MICRO-FIDUCIAL]  57.28,111.38 0 top
JP130  FIDUCIALUFIDUCIAL  [MICRO-FIDUCIAL]  33.53,135.13 0 top
JP131  FIDUCIALUFIDUCIAL  [MICRO-FIDUCIAL]  33.53,135.13 0 bottom
JP132  FIDUCIALUFIDUCIAL  [MICRO-FIDUCIAL]  57.28,111.38 0 bottom
JP133  STAND-OFF  [STAND-OFF]  61.21,133.35 0 top
JP134  STAND-OFF  [STAND-OFF]  81.53,133.35 0 top
JP135  FIDUCIALUFIDUCIAL  [MICRO-FIDUCIAL]  83.19,111.38 0 top
JP136  FIDUCIALUFIDUCIAL  [MICRO-FIDUCIAL]  59.44,135.13 0 top
JP137  FIDUCIALUFIDUCIAL  [MICRO-FIDUCIAL]  59.44,135.13 0 bottom
JP138  FIDUCIALUFIDUCIAL  [MICRO-FIDUCIAL]  83.19,111.38 0 bottom
JP139  STAND-OFF  [STAND-OFF]  87.12,133.35 0 top
JP140  STAND-OFF  [STAND-OFF]  107.44,133.35 0 top
JP141  FIDUCIALUFIDUCIAL  [MICRO-FIDUCIAL]  109.09,111.38 0 top
JP142  FIDUCIALUFIDUCIAL  [MICRO-FIDUCIAL]  85.34,135.13 0 top
JP143  FIDUCIALUFIDUCIAL  [MICRO-FIDUCIAL]  85.34,135.13 0 bottom
JP144  FIDUCIALUFIDUCIAL  [MICRO-FIDUCIAL]  109.09,111.38 0 bottom
JP145  STAND-OFF  [STAND-OFF]  113.03,133.35 0 top
JP146  STAND-OFF  [STAND-OFF]  133.35,133.35 0 top
JP147  FIDUCIALUFIDUCIAL  [MICRO-FIDUCIAL]  135,111.38 0 top
JP148  FIDUCIALUFIDUCIAL  [MICRO-FIDUCIAL]  111.25,135.13 0 top
JP149  FIDUCIALUFIDUCIAL  [MICRO-FIDUCIAL]  111.25,135.13 0 bottom
JP150  FIDUCIALUFIDUCIAL  [MICRO-FIDUCIAL]  135,111.38 0 bottom
JP151  STAND-OFF  [STAND-OFF]  9.4,159.26 0 top
JP152  STAND-OFF  [STAND-OFF]  29.72,159.26 0 top
JP153  FIDUCIALUFIDUCIAL  [MICRO-FIDUCIAL]  31.37,137.29 0 top
JP154  FIDUCIALUFIDUCIAL  [MICRO-FIDUCIAL]  7.62,161.04 0 top
JP155  FIDUCIALUFIDUCIAL  [MICRO-FIDUCIAL]  7.62,161.04 0 bottom
JP156  FIDUCIALUFIDUCIAL  [MICRO-FIDUCIAL]  31.37,137.29 0 bottom
JP157  STAND-OFF  [STAND-OFF]  35.31,159.26 0 top
JP158  STAND-OFF  [STAND-OFF]  55.63,159.26 0 top
JP159  FIDUCIALUFIDUCIAL  [MICRO-FIDUCIAL]  57.28,137.29 0 top
JP160  FIDUCIALUFIDUCIAL  [MICRO-FIDUCIAL]  33.53,161.04 0 top
JP161  FIDUCIALUFIDUCIAL  [MICRO-FIDUCIAL]  33.53,161.04 0 bottom
JP162  FIDUCIALUFIDUCIAL  [MICRO-FIDUCIAL]  57.28,137.29 0 bottom
JP163  STAND-OFF  [STAND-OFF]  61.21,159.26 0 top
JP164  STAND-OFF  [STAND-OFF]  81.53,159.26 0 top
JP165  FIDUCIALUFIDUCIAL  [MICRO-FIDUCIAL]  83.19,137.29 0 top
JP166  FIDUCIALUFIDUCIAL  [MICRO-FIDUCIAL]  59.44,161.04 0 top
JP167  FIDUCIALUFIDUCIAL  [MICRO-FIDUCIAL]  59.44,161.04 0 bottom
JP168  FIDUCIALUFIDUCIAL  [MICRO-FIDUCIAL]  83.19,137.29 0 bottom
JP169  STAND-OFF  [STAND-OFF]  87.12,159.26 0 top
JP170  STAND-OFF  [STAND-OFF]  107.44,159.26 0 top
JP171  FIDUCIALUFIDUCIAL  [MICRO-FIDUCIAL]  109.09,137.29 0 top
JP172  FIDUCIALUFIDUCIAL  [MICRO-FIDUCIAL]  85.34,161.04 0 top
JP173  FIDUCIALUFIDUCIAL  [MICRO-FIDUCIAL]  85.34,161.04 0 bottom
JP174  FIDUCIALUFIDUCIAL  [MICRO-FIDUCIAL]  109.09,137.29 0 bottom
JP175  STAND-OFF  [STAND-OFF]  113.03,159.26 0 top
JP176  STAND-OFF  [STAND-OFF]  133.35,159.26 0 top
JP177  FIDUCIALUFIDUCIAL  [MICRO-FIDUCIAL]  135,137.29 0 top
JP178  FIDUCIALUFIDUCIAL  [MICRO-FIDUCIAL]  111.25,161.04 0 top
JP179  FIDUCIALUFIDUCIAL  [MICRO-FIDUCIAL]  111.25,161.04 0 bottom
JP180  FIDUCIALUFIDUCIAL  [MICRO-FIDUCIAL]  135,137.29 0 bottom
JP181  STAND-OFF  [STAND-OFF]  9.4,185.17 0 top
JP182  STAND-OFF  [STAND-OFF]  29.72,185.17 0 top
JP183  FIDUCIALUFIDUCIAL  [MICRO-FIDUCIAL]  31.37,163.19 0 top
JP184  FIDUCIALUFIDUCIAL  [MICRO-FIDUCIAL]  7.62,186.94 0 top
JP185  FIDUCIALUFIDUCIAL  [MICRO-FIDUCIAL]  7.62,186.94 0 bottom
JP186  FIDUCIALUFIDUCIAL  [MICRO-FIDUCIAL]  31.37,163.19 0 bottom
JP187  STAND-OFF  [STAND-OFF]  35.31,185.17 0 top
JP188  STAND-OFF  [STAND-OFF]  55.63,185.17 0 top
JP189  FIDUCIALUFIDUCIAL  [MICRO-FIDUCIAL]  57.28,163.19 0 top
JP190  FIDUCIALUFIDUCIAL  [MICRO-FIDUCIAL]  33.53,186.94 0 top
JP191  FIDUCIALUFIDUCIAL  [MICRO-FIDUCIAL]  33.53,186.94 0 bottom
JP192  FIDUCIALUFIDUCIAL  [MICRO-FIDUCIAL]  57.28,163.19 0 bottom
JP193  STAND-OFF  [STAND-OFF]  61.21,185.17 0 top
JP194  STAND-OFF  [STAND-OFF]  81.53,185.17 0 top
JP195  FIDUCIALUFIDUCIAL  [MICRO-FIDUCIAL]  83.19,163.19 0 top
JP196  FIDUCIALUFIDUCIAL  [MICRO-FIDUCIAL]  59.44,186.94 0 top
JP197  FIDUCIALUFIDUCIAL  [MICRO-FIDUCIAL]  59.44,186.94 0 bottom
JP198  FIDUCIALUFIDUCIAL  [MICRO-FIDUCIAL]  83.19,163.19 0 bottom
JP199  STAND-OFF  [STAND-OFF]  87.12,185.17 0 top
JP200  STAND-OFF  [STAND-OFF]  107.44,185.17 0 top
JP201  FIDUCIALUFIDUCIAL  [MICRO-FIDUCIAL]  109.09,163.19 0 top
JP202  FIDUCIALUFIDUCIAL  [MICRO-FIDUCIAL]  85.34,186.94 0 top
JP203  FIDUCIALUFIDUCIAL  [MICRO-FIDUCIAL]  85.34,186.94 0 bottom
JP204  FIDUCIALUFIDUCIAL  [MICRO-FIDUCIAL]  109.09,163.19 0 bottom
JP205  STAND-OFF  [STAND-OFF]  113.03,185.17 0 top
JP206  STAND-OFF  [STAND-OFF]  133.35,185.17 0 top
JP207  FIDUCIALUFIDUCIAL  [MICRO-FIDUCIAL]  135,163.19 0 top
JP208  FIDUCIALUFIDUCIAL  [MICRO-FIDUCIAL]  111.25,186.94 0 top
JP209  FIDUCIALUFIDUCIAL  [MICRO-FIDUCIAL]  111.25,186.94 0 bottom
JP210  FIDUCIALUFIDUCIAL  [MICRO-FIDUCIAL]  135,163.19 0 bottom
LOGO1  REVISION  [REVISION]  31.5,-8.38 0 top  (outside the outline)
LOGO2  REVISION  [REVISION]  5.59,-8.38 0 top  (outside the outline)
LOGO3  SFE_LOGO_NAME_FLAME.1_INCH  [SFE_LOGO_NAME_FLAME_.1]  19.56,28.07 0 top
LOGO4  SFE_LOGO_NAME_FLAME.1_INCH  [SFE_LOGO_NAME_FLAME_.1]  19.56,28.07 0 bottom
LOGO5  OSHW-LOGOS  [OSHW-LOGO-S]  9.4,10.67 0 bottom
LOGO6  SFE_LOGO_NAME_FLAME.1_INCH  [SFE_LOGO_NAME_FLAME_.1]  45.47,28.07 0 top
LOGO7  SFE_LOGO_NAME_FLAME.1_INCH  [SFE_LOGO_NAME_FLAME_.1]  45.47,28.07 0 bottom
LOGO8  OSHW-LOGOS  [OSHW-LOGO-S]  35.31,10.67 0 bottom
LOGO9  REVISION  [REVISION]  57.4,-8.38 0 top  (outside the outline)
LOGO10  SFE_LOGO_NAME_FLAME.1_INCH  [SFE_LOGO_NAME_FLAME_.1]  71.37,28.07 0 top
LOGO11  SFE_LOGO_NAME_FLAME.1_INCH  [SFE_LOGO_NAME_FLAME_.1]  71.37,28.07 0 bottom
LOGO12  OSHW-LOGOS  [OSHW-LOGO-S]  61.21,10.67 0 bottom
LOGO13  REVISION  [REVISION]  83.31,-8.38 0 top  (outside the outline)
LOGO14  SFE_LOGO_NAME_FLAME.1_INCH  [SFE_LOGO_NAME_FLAME_.1]  97.28,28.07 0 top
LOGO15  SFE_LOGO_NAME_FLAME.1_INCH  [SFE_LOGO_NAME_FLAME_.1]  97.28,28.07 0 bottom
LOGO16  OSHW-LOGOS  [OSHW-LOGO-S]  87.12,10.67 0 bottom
LOGO17  REVISION  [REVISION]  109.22,-8.38 0 top  (outside the outline)
LOGO18  SFE_LOGO_NAME_FLAME.1_INCH  [SFE_LOGO_NAME_FLAME_.1]  123.19,28.07 0 top
LOGO19  SFE_LOGO_NAME_FLAME.1_INCH  [SFE_LOGO_NAME_FLAME_.1]  123.19,28.07 0 bottom
LOGO20  OSHW-LOGOS  [OSHW-LOGO-S]  113.03,10.67 0 bottom
LOGO21  REVISION  [REVISION]  5.59,17.53 0 top
LOGO22  SFE_LOGO_NAME_FLAME.1_INCH  [SFE_LOGO_NAME_FLAME_.1]  19.56,53.97 0 top
LOGO23  SFE_LOGO_NAME_FLAME.1_INCH  [SFE_LOGO_NAME_FLAME_.1]  19.56,53.97 0 bottom
LOGO24  OSHW-LOGOS  [OSHW-LOGO-S]  9.4,36.58 0 bottom
LOGO25  REVISION  [REVISION]  31.5,17.53 0 top
LOGO26  SFE_LOGO_NAME_FLAME.1_INCH  [SFE_LOGO_NAME_FLAME_.1]  45.47,53.97 0 top
LOGO27  SFE_LOGO_NAME_FLAME.1_INCH  [SFE_LOGO_NAME_FLAME_.1]  45.47,53.97 0 bottom
LOGO28  OSHW-LOGOS  [OSHW-LOGO-S]  35.31,36.58 0 bottom
LOGO29  REVISION  [REVISION]  57.4,17.53 0 top
LOGO30  SFE_LOGO_NAME_FLAME.1_INCH  [SFE_LOGO_NAME_FLAME_.1]  71.37,53.97 0 top
LOGO31  SFE_LOGO_NAME_FLAME.1_INCH  [SFE_LOGO_NAME_FLAME_.1]  71.37,53.97 0 bottom
LOGO32  OSHW-LOGOS  [OSHW-LOGO-S]  61.21,36.58 0 bottom
LOGO33  REVISION  [REVISION]  83.31,17.53 0 top
LOGO34  SFE_LOGO_NAME_FLAME.1_INCH  [SFE_LOGO_NAME_FLAME_.1]  97.28,53.97 0 top
LOGO35  SFE_LOGO_NAME_FLAME.1_INCH  [SFE_LOGO_NAME_FLAME_.1]  97.28,53.97 0 bottom
LOGO36  OSHW-LOGOS  [OSHW-LOGO-S]  87.12,36.58 0 bottom
LOGO37  REVISION  [REVISION]  109.22,17.53 0 top
LOGO38  SFE_LOGO_NAME_FLAME.1_INCH  [SFE_LOGO_NAME_FLAME_.1]  123.19,53.97 0 top
LOGO39  SFE_LOGO_NAME_FLAME.1_INCH  [SFE_LOGO_NAME_FLAME_.1]  123.19,53.97 0 bottom
LOGO40  OSHW-LOGOS  [OSHW-LOGO-S]  113.03,36.58 0 bottom
LOGO41  REVISION  [REVISION]  5.59,43.43 0 top
LOGO42  SFE_LOGO_NAME_FLAME.1_INCH  [SFE_LOGO_NAME_FLAME_.1]  19.56,79.88 0 top
LOGO43  SFE_LOGO_NAME_FLAME.1_INCH  [SFE_LOGO_NAME_FLAME_.1]  19.56,79.88 0 bottom
LOGO44  OSHW-LOGOS  [OSHW-LOGO-S]  9.4,62.48 0 bottom
LOGO45  REVISION  [REVISION]  31.5,43.43 0 top
LOGO46  SFE_LOGO_NAME_FLAME.1_INCH  [SFE_LOGO_NAME_FLAME_.1]  45.47,79.88 0 top
LOGO47  SFE_LOGO_NAME_FLAME.1_INCH  [SFE_LOGO_NAME_FLAME_.1]  45.47,79.88 0 bottom
LOGO48  OSHW-LOGOS  [OSHW-LOGO-S]  35.31,62.48 0 bottom
LOGO49  REVISION  [REVISION]  57.4,43.43 0 top
LOGO50  SFE_LOGO_NAME_FLAME.1_INCH  [SFE_LOGO_NAME_FLAME_.1]  71.37,79.88 0 top
LOGO51  SFE_LOGO_NAME_FLAME.1_INCH  [SFE_LOGO_NAME_FLAME_.1]  71.37,79.88 0 bottom
LOGO52  OSHW-LOGOS  [OSHW-LOGO-S]  61.21,62.48 0 bottom
LOGO53  REVISION  [REVISION]  83.31,43.43 0 top
LOGO54  SFE_LOGO_NAME_FLAME.1_INCH  [SFE_LOGO_NAME_FLAME_.1]  97.28,79.88 0 top
LOGO55  SFE_LOGO_NAME_FLAME.1_INCH  [SFE_LOGO_NAME_FLAME_.1]  97.28,79.88 0 bottom
LOGO56  OSHW-LOGOS  [OSHW-LOGO-S]  87.12,62.48 0 bottom
LOGO57  REVISION  [REVISION]  109.22,43.43 0 top
LOGO58  SFE_LOGO_NAME_FLAME.1_INCH  [SFE_LOGO_NAME_FLAME_.1]  123.19,79.88 0 top
LOGO59  SFE_LOGO_NAME_FLAME.1_INCH  [SFE_LOGO_NAME_FLAME_.1]  123.19,79.88 0 bottom
LOGO60  OSHW-LOGOS  [OSHW-LOGO-S]  113.03,62.48 0 bottom
LOGO61  REVISION  [REVISION]  5.59,69.34 0 top
LOGO62  SFE_LOGO_NAME_FLAME.1_INCH  [SFE_LOGO_NAME_FLAME_.1]  19.56,105.79 0 top
LOGO63  SFE_LOGO_NAME_FLAME.1_INCH  [SFE_LOGO_NAME_FLAME_.1]  19.56,105.79 0 bottom
LOGO64  OSHW-LOGOS  [OSHW-LOGO-S]  9.4,88.39 0 bottom
LOGO65  REVISION  [REVISION]  31.5,69.34 0 top
LOGO66  SFE_LOGO_NAME_FLAME.1_INCH  [SFE_LOGO_NAME_FLAME_.1]  45.47,105.79 0 top
LOGO67  SFE_LOGO_NAME_FLAME.1_INCH  [SFE_LOGO_NAME_FLAME_.1]  45.47,105.79 0 bottom
LOGO68  OSHW-LOGOS  [OSHW-LOGO-S]  35.31,88.39 0 bottom
LOGO69  REVISION  [REVISION]  57.4,69.34 0 top
LOGO70  SFE_LOGO_NAME_FLAME.1_INCH  [SFE_LOGO_NAME_FLAME_.1]  71.37,105.79 0 top
LOGO71  SFE_LOGO_NAME_FLAME.1_INCH  [SFE_LOGO_NAME_FLAME_.1]  71.37,105.79 0 bottom
LOGO72  OSHW-LOGOS  [OSHW-LOGO-S]  61.21,88.39 0 bottom
LOGO73  REVISION  [REVISION]  83.31,69.34 0 top
LOGO74  SFE_LOGO_NAME_FLAME.1_INCH  [SFE_LOGO_NAME_FLAME_.1]  97.28,105.79 0 top
LOGO75  SFE_LOGO_NAME_FLAME.1_INCH  [SFE_LOGO_NAME_FLAME_.1]  97.28,105.79 0 bottom
LOGO76  OSHW-LOGOS  [OSHW-LOGO-S]  87.12,88.39 0 bottom
LOGO77  REVISION  [REVISION]  109.22,69.34 0 top
LOGO78  SFE_LOGO_NAME_FLAME.1_INCH  [SFE_LOGO_NAME_FLAME_.1]  123.19,105.79 0 top
LOGO79  SFE_LOGO_NAME_FLAME.1_INCH  [SFE_LOGO_NAME_FLAME_.1]  123.19,105.79 0 bottom
LOGO80  OSHW-LOGOS  [OSHW-LOGO-S]  113.03,88.39 0 bottom
LOGO81  REVISION  [REVISION]  5.59,95.25 0 top
LOGO82  SFE_LOGO_NAME_FLAME.1_INCH  [SFE_LOGO_NAME_FLAME_.1]  19.56,131.7 0 top
LOGO83  SFE_LOGO_NAME_FLAME.1_INCH  [SFE_LOGO_NAME_FLAME_.1]  19.56,131.7 0 bottom
LOGO84  OSHW-LOGOS  [OSHW-LOGO-S]  9.4,114.3 0 bottom
LOGO85  REVISION  [REVISION]  31.5,95.25 0 top
LOGO86  SFE_LOGO_NAME_FLAME.1_INCH  [SFE_LOGO_NAME_FLAME_.1]  45.47,131.7 0 top
LOGO87  SFE_LOGO_NAME_FLAME.1_INCH  [SFE_LOGO_NAME_FLAME_.1]  45.47,131.7 0 bottom
LOGO88  OSHW-LOGOS  [OSHW-LOGO-S]  35.31,114.3 0 bottom
LOGO89  REVISION  [REVISION]  57.4,95.25 0 top
LOGO90  SFE_LOGO_NAME_FLAME.1_INCH  [SFE_LOGO_NAME_FLAME_.1]  71.37,131.7 0 top
LOGO91  SFE_LOGO_NAME_FLAME.1_INCH  [SFE_LOGO_NAME_FLAME_.1]  71.37,131.7 0 bottom
LOGO92  OSHW-LOGOS  [OSHW-LOGO-S]  61.21,114.3 0 bottom
LOGO93  REVISION  [REVISION]  83.31,95.25 0 top
LOGO94  SFE_LOGO_NAME_FLAME.1_INCH  [SFE_LOGO_NAME_FLAME_.1]  97.28,131.7 0 top
LOGO95  SFE_LOGO_NAME_FLAME.1_INCH  [SFE_LOGO_NAME_FLAME_.1]  97.28,131.7 0 bottom
LOGO96  OSHW-LOGOS  [OSHW-LOGO-S]  87.12,114.3 0 bottom
LOGO97  REVISION  [REVISION]  109.22,95.25 0 top
LOGO98  SFE_LOGO_NAME_FLAME.1_INCH  [SFE_LOGO_NAME_FLAME_.1]  123.19,131.7 0 top
LOGO99  SFE_LOGO_NAME_FLAME.1_INCH  [SFE_LOGO_NAME_FLAME_.1]  123.19,131.7 0 bottom
LOGO100  OSHW-LOGOS  [OSHW-LOGO-S]  113.03,114.3 0 bottom
LOGO101  REVISION  [REVISION]  5.59,121.16 0 top
LOGO102  SFE_LOGO_NAME_FLAME.1_INCH  [SFE_LOGO_NAME_FLAME_.1]  19.56,157.61 0 top
LOGO103  SFE_LOGO_NAME_FLAME.1_INCH  [SFE_LOGO_NAME_FLAME_.1]  19.56,157.61 0 bottom
LOGO104  OSHW-LOGOS  [OSHW-LOGO-S]  9.4,140.21 0 bottom
LOGO105  REVISION  [REVISION]  31.5,121.16 0 top
LOGO106  SFE_LOGO_NAME_FLAME.1_INCH  [SFE_LOGO_NAME_FLAME_.1]  45.47,157.61 0 top
LOGO107  SFE_LOGO_NAME_FLAME.1_INCH  [SFE_LOGO_NAME_FLAME_.1]  45.47,157.61 0 bottom
LOGO108  OSHW-LOGOS  [OSHW-LOGO-S]  35.31,140.21 0 bottom
LOGO109  REVISION  [REVISION]  57.4,121.16 0 top
LOGO110  SFE_LOGO_NAME_FLAME.1_INCH  [SFE_LOGO_NAME_FLAME_.1]  71.37,157.61 0 top
LOGO111  SFE_LOGO_NAME_FLAME.1_INCH  [SFE_LOGO_NAME_FLAME_.1]  71.37,157.61 0 bottom
LOGO112  OSHW-LOGOS  [OSHW-LOGO-S]  61.21,140.21 0 bottom
LOGO113  REVISION  [REVISION]  83.31,121.16 0 top
LOGO114  SFE_LOGO_NAME_FLAME.1_INCH  [SFE_LOGO_NAME_FLAME_.1]  97.28,157.61 0 top
LOGO115  SFE_LOGO_NAME_FLAME.1_INCH  [SFE_LOGO_NAME_FLAME_.1]  97.28,157.61 0 bottom
LOGO116  OSHW-LOGOS  [OSHW-LOGO-S]  87.12,140.21 0 bottom
LOGO117  REVISION  [REVISION]  109.22,121.16 0 top
LOGO118  SFE_LOGO_NAME_FLAME.1_INCH  [SFE_LOGO_NAME_FLAME_.1]  123.19,157.61 0 top
LOGO119  SFE_LOGO_NAME_FLAME.1_INCH  [SFE_LOGO_NAME_FLAME_.1]  123.19,157.61 0 bottom
LOGO120  OSHW-LOGOS  [OSHW-LOGO-S]  113.03,140.21 0 bottom
LOGO121  REVISION  [REVISION]  5.59,147.07 0 top
LOGO122  SFE_LOGO_NAME_FLAME.1_INCH  [SFE_LOGO_NAME_FLAME_.1]  19.56,183.52 0 top
LOGO123  SFE_LOGO_NAME_FLAME.1_INCH  [SFE_LOGO_NAME_FLAME_.1]  19.56,183.52 0 bottom
LOGO124  OSHW-LOGOS  [OSHW-LOGO-S]  9.4,166.12 0 bottom
LOGO125  REVISION  [REVISION]  31.5,147.07 0 top
LOGO126  SFE_LOGO_NAME_FLAME.1_INCH  [SFE_LOGO_NAME_FLAME_.1]  45.47,183.52 0 top
LOGO127  SFE_LOGO_NAME_FLAME.1_INCH  [SFE_LOGO_NAME_FLAME_.1]  45.47,183.52 0 bottom
LOGO128  OSHW-LOGOS  [OSHW-LOGO-S]  35.31,166.12 0 bottom
LOGO129  REVISION  [REVISION]  57.4,147.07 0 top
LOGO130  SFE_LOGO_NAME_FLAME.1_INCH  [SFE_LOGO_NAME_FLAME_.1]  71.37,183.52 0 top
LOGO131  SFE_LOGO_NAME_FLAME.1_INCH  [SFE_LOGO_NAME_FLAME_.1]  71.37,183.52 0 bottom
LOGO132  OSHW-LOGOS  [OSHW-LOGO-S]  61.21,166.12 0 bottom
LOGO133  REVISION  [REVISION]  83.31,147.07 0 top
LOGO134  SFE_LOGO_NAME_FLAME.1_INCH  [SFE_LOGO_NAME_FLAME_.1]  97.28,183.52 0 top
LOGO135  SFE_LOGO_NAME_FLAME.1_INCH  [SFE_LOGO_NAME_FLAME_.1]  97.28,183.52 0 bottom
LOGO136  OSHW-LOGOS  [OSHW-LOGO-S]  87.12,166.12 0 bottom
LOGO137  REVISION  [REVISION]  109.22,147.07 0 top
LOGO138  SFE_LOGO_NAME_FLAME.1_INCH  [SFE_LOGO_NAME_FLAME_.1]  123.19,183.52 0 top
LOGO139  SFE_LOGO_NAME_FLAME.1_INCH  [SFE_LOGO_NAME_FLAME_.1]  123.19,183.52 0 bottom
LOGO140  OSHW-LOGOS  [OSHW-LOGO-S]  113.03,166.12 0 bottom
PWR  JUMPER-SMT_2_NC_TRACE_SILK  [SMT-JUMPER_2_NC_TRACE_SILK]  10.03,9.4 270 top
PWR1  JUMPER-SMT_2_NC_TRACE_SILK  [SMT-JUMPER_2_NC_TRACE_SILK]  35.94,9.4 270 top
PWR2  JUMPER-SMT_2_NC_TRACE_SILK  [SMT-JUMPER_2_NC_TRACE_SILK]  61.85,9.4 270 top
PWR3  JUMPER-SMT_2_NC_TRACE_SILK  [SMT-JUMPER_2_NC_TRACE_SILK]  87.76,9.4 270 top
PWR4  JUMPER-SMT_2_NC_TRACE_SILK  [SMT-JUMPER_2_NC_TRACE_SILK]  113.67,9.4 270 top
PWR5  JUMPER-SMT_2_NC_TRACE_SILK  [SMT-JUMPER_2_NC_TRACE_SILK]  10.03,35.31 270 top
PWR6  JUMPER-SMT_2_NC_TRACE_SILK  [SMT-JUMPER_2_NC_TRACE_SILK]  35.94,35.31 270 top
PWR7  JUMPER-SMT_2_NC_TRACE_SILK  [SMT-JUMPER_2_NC_TRACE_SILK]  61.85,35.31 270 top
PWR8  JUMPER-SMT_2_NC_TRACE_SILK  [SMT-JUMPER_2_NC_TRACE_SILK]  87.76,35.31 270 top
PWR9  JUMPER-SMT_2_NC_TRACE_SILK  [SMT-JUMPER_2_NC_TRACE_SILK]  113.67,35.31 270 top
PWR10  JUMPER-SMT_2_NC_TRACE_SILK  [SMT-JUMPER_2_NC_TRACE_SILK]  10.03,61.21 270 top
PWR11  JUMPER-SMT_2_NC_TRACE_SILK  [SMT-JUMPER_2_NC_TRACE_SILK]  35.94,61.21 270 top
PWR12  JUMPER-SMT_2_NC_TRACE_SILK  [SMT-JUMPER_2_NC_TRACE_SILK]  61.85,61.21 270 top
PWR13  JUMPER-SMT_2_NC_TRACE_SILK  [SMT-JUMPER_2_NC_TRACE_SILK]  87.76,61.21 270 top
PWR14  JUMPER-SMT_2_NC_TRACE_SILK  [SMT-JUMPER_2_NC_TRACE_SILK]  113.67,61.21 270 top
PWR15  JUMPER-SMT_2_NC_TRACE_SILK  [SMT-JUMPER_2_NC_TRACE_SILK]  10.03,87.12 270 top
PWR16  JUMPER-SMT_2_NC_TRACE_SILK  [SMT-JUMPER_2_NC_TRACE_SILK]  35.94,87.12 270 top
PWR17  JUMPER-SMT_2_NC_TRACE_SILK  [SMT-JUMPER_2_NC_TRACE_SILK]  61.85,87.12 270 top
PWR18  JUMPER-SMT_2_NC_TRACE_SILK  [SMT-JUMPER_2_NC_TRACE_SILK]  87.76,87.12 270 top
PWR19  JUMPER-SMT_2_NC_TRACE_SILK  [SMT-JUMPER_2_NC_TRACE_SILK]  113.67,87.12 270 top
PWR20  JUMPER-SMT_2_NC_TRACE_SILK  [SMT-JUMPER_2_NC_TRACE_SILK]  10.03,113.03 270 top
PWR21  JUMPER-SMT_2_NC_TRACE_SILK  [SMT-JUMPER_2_NC_TRACE_SILK]  35.94,113.03 270 top
PWR22  JUMPER-SMT_2_NC_TRACE_SILK  [SMT-JUMPER_2_NC_TRACE_SILK]  61.85,113.03 270 top
PWR23  JUMPER-SMT_2_NC_TRACE_SILK  [SMT-JUMPER_2_NC_TRACE_SILK]  87.76,113.03 270 top
PWR24  JUMPER-SMT_2_NC_TRACE_SILK  [SMT-JUMPER_2_NC_TRACE_SILK]  113.67,113.03 270 top
PWR25  JUMPER-SMT_2_NC_TRACE_SILK  [SMT-JUMPER_2_NC_TRACE_SILK]  10.03,138.94 270 top
PWR26  JUMPER-SMT_2_NC_TRACE_SILK  [SMT-JUMPER_2_NC_TRACE_SILK]  35.94,138.94 270 top
PWR27  JUMPER-SMT_2_NC_TRACE_SILK  [SMT-JUMPER_2_NC_TRACE_SILK]  61.85,138.94 270 top
PWR28  JUMPER-SMT_2_NC_TRACE_SILK  [SMT-JUMPER_2_NC_TRACE_SILK]  87.76,138.94 270 top
PWR29  JUMPER-SMT_2_NC_TRACE_SILK  [SMT-JUMPER_2_NC_TRACE_SILK]  113.67,138.94 270 top
PWR30  JUMPER-SMT_2_NC_TRACE_SILK  [SMT-JUMPER_2_NC_TRACE_SILK]  10.03,164.85 270 top
PWR31  JUMPER-SMT_2_NC_TRACE_SILK  [SMT-JUMPER_2_NC_TRACE_SILK]  35.94,164.85 270 top
PWR32  JUMPER-SMT_2_NC_TRACE_SILK  [SMT-JUMPER_2_NC_TRACE_SILK]  61.85,164.85 270 top
PWR33  JUMPER-SMT_2_NC_TRACE_SILK  [SMT-JUMPER_2_NC_TRACE_SILK]  87.76,164.85 270 top
PWR34  JUMPER-SMT_2_NC_TRACE_SILK  [SMT-JUMPER_2_NC_TRACE_SILK]  113.67,164.85 270 top
Q1  220mA/50V/3.5Ω  [SOT23-3]  15.75,24.64 90 top
Q2  220mA/50V/3.5Ω  [SOT23-3]  23.37,24.64 270 top
Q3  220mA/50V/3.5Ω  [SOT23-3]  41.66,24.64 90 top
Q4  220mA/50V/3.5Ω  [SOT23-3]  49.28,24.64 270 top
Q5  220mA/50V/3.5Ω  [SOT23-3]  67.56,24.64 90 top
Q6  220mA/50V/3.5Ω  [SOT23-3]  75.18,24.64 270 top
Q7  220mA/50V/3.5Ω  [SOT23-3]  93.47,24.64 90 top
Q8  220mA/50V/3.5Ω  [SOT23-3]  101.09,24.64 270 top
Q9  220mA/50V/3.5Ω  [SOT23-3]  119.38,24.64 90 top
Q10  220mA/50V/3.5Ω  [SOT23-3]  127,24.64 270 top
Q11  220mA/50V/3.5Ω  [SOT23-3]  15.75,50.55 90 top
Q12  220mA/50V/3.5Ω  [SOT23-3]  23.37,50.55 270 top
Q13  220mA/50V/3.5Ω  [SOT23-3]  41.66,50.55 90 top
Q14  220mA/50V/3.5Ω  [SOT23-3]  49.28,50.55 270 top
Q15  220mA/50V/3.5Ω  [SOT23-3]  67.56,50.55 90 top
Q16  220mA/50V/3.5Ω  [SOT23-3]  75.18,50.55 270 top
Q17  220mA/50V/3.5Ω  [SOT23-3]  93.47,50.55 90 top
Q18  220mA/50V/3.5Ω  [SOT23-3]  101.09,50.55 270 top
Q19  220mA/50V/3.5Ω  [SOT23-3]  119.38,50.55 90 top
Q20  220mA/50V/3.5Ω  [SOT23-3]  127,50.55 270 top
Q21  220mA/50V/3.5Ω  [SOT23-3]  15.75,76.45 90 top
Q22  220mA/50V/3.5Ω  [SOT23-3]  23.37,76.45 270 top
Q23  220mA/50V/3.5Ω  [SOT23-3]  41.66,76.45 90 top
Q24  220mA/50V/3.5Ω  [SOT23-3]  49.28,76.45 270 top
Q25  220mA/50V/3.5Ω  [SOT23-3]  67.56,76.45 90 top
Q26  220mA/50V/3.5Ω  [SOT23-3]  75.18,76.45 270 top
Q27  220mA/50V/3.5Ω  [SOT23-3]  93.47,76.45 90 top
Q28  220mA/50V/3.5Ω  [SOT23-3]  101.09,76.45 270 top
Q29  220mA/50V/3.5Ω  [SOT23-3]  119.38,76.45 90 top
Q30  220mA/50V/3.5Ω  [SOT23-3]  127,76.45 270 top
Q31  220mA/50V/3.5Ω  [SOT23-3]  15.75,102.36 90 top
Q32  220mA/50V/3.5Ω  [SOT23-3]  23.37,102.36 270 top
Q33  220mA/50V/3.5Ω  [SOT23-3]  41.66,102.36 90 top
Q34  220mA/50V/3.5Ω  [SOT23-3]  49.28,102.36 270 top
Q35  220mA/50V/3.5Ω  [SOT23-3]  67.56,102.36 90 top
Q36  220mA/50V/3.5Ω  [SOT23-3]  75.18,102.36 270 top
Q37  220mA/50V/3.5Ω  [SOT23-3]  93.47,102.36 90 top
Q38  220mA/50V/3.5Ω  [SOT23-3]  101.09,102.36 270 top
Q39  220mA/50V/3.5Ω  [SOT23-3]  119.38,102.36 90 top
Q40  220mA/50V/3.5Ω  [SOT23-3]  127,102.36 270 top
Q41  220mA/50V/3.5Ω  [SOT23-3]  15.75,128.27 90 top
Q42  220mA/50V/3.5Ω  [SOT23-3]  23.37,128.27 270 top
Q43  220mA/50V/3.5Ω  [SOT23-3]  41.66,128.27 90 top
Q44  220mA/50V/3.5Ω  [SOT23-3]  49.28,128.27 270 top
Q45  220mA/50V/3.5Ω  [SOT23-3]  67.56,128.27 90 top
Q46  220mA/50V/3.5Ω  [SOT23-3]  75.18,128.27 270 top
Q47  220mA/50V/3.5Ω  [SOT23-3]  93.47,128.27 90 top
Q48  220mA/50V/3.5Ω  [SOT23-3]  101.09,128.27 270 top
Q49  220mA/50V/3.5Ω  [SOT23-3]  119.38,128.27 90 top
Q50  220mA/50V/3.5Ω  [SOT23-3]  127,128.27 270 top
Q51  220mA/50V/3.5Ω  [SOT23-3]  15.75,154.18 90 top
Q52  220mA/50V/3.5Ω  [SOT23-3]  23.37,154.18 270 top
Q53  220mA/50V/3.5Ω  [SOT23-3]  41.66,154.18 90 top
Q54  220mA/50V/3.5Ω  [SOT23-3]  49.28,154.18 270 top
Q55  220mA/50V/3.5Ω  [SOT23-3]  67.56,154.18 90 top
Q56  220mA/50V/3.5Ω  [SOT23-3]  75.18,154.18 270 top
Q57  220mA/50V/3.5Ω  [SOT23-3]  93.47,154.18 90 top
Q58  220mA/50V/3.5Ω  [SOT23-3]  101.09,154.18 270 top
Q59  220mA/50V/3.5Ω  [SOT23-3]  119.38,154.18 90 top
Q60  220mA/50V/3.5Ω  [SOT23-3]  127,154.18 270 top
Q61  220mA/50V/3.5Ω  [SOT23-3]  15.75,180.09 90 top
Q62  220mA/50V/3.5Ω  [SOT23-3]  23.37,180.09 270 top
Q63  220mA/50V/3.5Ω  [SOT23-3]  41.66,180.09 90 top
Q64  220mA/50V/3.5Ω  [SOT23-3]  49.28,180.09 270 top
Q65  220mA/50V/3.5Ω  [SOT23-3]  67.56,180.09 90 top
Q66  220mA/50V/3.5Ω  [SOT23-3]  75.18,180.09 270 top
Q67  220mA/50V/3.5Ω  [SOT23-3]  93.47,180.09 90 top
Q68  220mA/50V/3.5Ω  [SOT23-3]  101.09,180.09 270 top
Q69  220mA/50V/3.5Ω  [SOT23-3]  119.38,180.09 90 top
Q70  220mA/50V/3.5Ω  [SOT23-3]  127,180.09 270 top
R1  10k  [0603]  13.21,24.64 90 top
R2  10k  [0603]  18.29,24.64 270 top
R3  1k  [0603]  10.03,11.56 0 top
R4  1k  [0603]  35.94,11.56 0 top
R5  10k  [0603]  39.12,24.64 90 top
R6  10k  [0603]  20.83,24.64 90 top
R7  10k  [0603]  25.91,24.64 90 top
R8  10k  [0603]  44.2,24.64 270 top
R9  10k  [0603]  46.74,24.64 90 top
R10  10k  [0603]  51.82,24.64 90 top
R11  1k  [0603]  61.85,11.56 0 top
R12  10k  [0603]  65.02,24.64 90 top
R13  10k  [0603]  70.1,24.64 270 top
R14  10k  [0603]  72.64,24.64 90 top
R15  10k  [0603]  77.72,24.64 90 top
R16  1k  [0603]  87.76,11.56 0 top
R17  10k  [0603]  90.93,24.64 90 top
R18  10k  [0603]  96.01,24.64 270 top
R19  10k  [0603]  98.55,24.64 90 top
R20  10k  [0603]  103.63,24.64 90 top
R21  1k  [0603]  113.67,11.56 0 top
R22  10k  [0603]  116.84,24.64 90 top
R23  10k  [0603]  121.92,24.64 270 top
R24  10k  [0603]  124.46,24.64 90 top
R25  10k  [0603]  129.54,24.64 90 top
R26  1k  [0603]  10.03,37.46 0 top
R27  10k  [0603]  13.21,50.55 90 top
R28  10k  [0603]  18.29,50.55 270 top
R29  10k  [0603]  20.83,50.55 90 top
R30  10k  [0603]  25.91,50.55 90 top
R31  1k  [0603]  35.94,37.46 0 top
R32  10k  [0603]  39.12,50.55 90 top
R33  10k  [0603]  44.2,50.55 270 top
R34  10k  [0603]  46.74,50.55 90 top
R35  10k  [0603]  51.82,50.55 90 top
R36  1k  [0603]  61.85,37.46 0 top
R37  10k  [0603]  65.02,50.55 90 top
R38  10k  [0603]  70.1,50.55 270 top
R39  10k  [0603]  72.64,50.55 90 top
R40  10k  [0603]  77.72,50.55 90 top
R41  1k  [0603]  87.76,37.46 0 top
R42  10k  [0603]  90.93,50.55 90 top
R43  10k  [0603]  96.01,50.55 270 top
R44  10k  [0603]  98.55,50.55 90 top
R45  10k  [0603]  103.63,50.55 90 top
R46  1k  [0603]  113.67,37.46 0 top
R47  10k  [0603]  116.84,50.55 90 top
R48  10k  [0603]  121.92,50.55 270 top
R49  10k  [0603]  124.46,50.55 90 top
R50  10k  [0603]  129.54,50.55 90 top
R51  1k  [0603]  10.03,63.37 0 top
R52  10k  [0603]  13.21,76.45 90 top
R53  10k  [0603]  18.29,76.45 270 top
R54  10k  [0603]  20.83,76.45 90 top
R55  10k  [0603]  25.91,76.45 90 top
R56  1k  [0603]  35.94,63.37 0 top
R57  10k  [0603]  39.12,76.45 90 top
R58  10k  [0603]  44.2,76.45 270 top
R59  10k  [0603]  46.74,76.45 90 top
R60  10k  [0603]  51.82,76.45 90 top
R61  1k  [0603]  61.85,63.37 0 top
R62  10k  [0603]  65.02,76.45 90 top
R63  10k  [0603]  70.1,76.45 270 top
R64  10k  [0603]  72.64,76.45 90 top
R65  10k  [0603]  77.72,76.45 90 top
R66  1k  [0603]  87.76,63.37 0 top
R67  10k  [0603]  90.93,76.45 90 top
R68  10k  [0603]  96.01,76.45 270 top
R69  10k  [0603]  98.55,76.45 90 top
R70  10k  [0603]  103.63,76.45 90 top
R71  1k  [0603]  113.67,63.37 0 top
R72  10k  [0603]  116.84,76.45 90 top
R73  10k  [0603]  121.92,76.45 270 top
R74  10k  [0603]  124.46,76.45 90 top
R75  10k  [0603]  129.54,76.45 90 top
R76  1k  [0603]  10.03,89.28 0 top
R77  10k  [0603]  13.21,102.36 90 top
R78  10k  [0603]  18.29,102.36 270 top
R79  10k  [0603]  20.83,102.36 90 top
R80  10k  [0603]  25.91,102.36 90 top
R81  1k  [0603]  35.94,89.28 0 top
R82  10k  [0603]  39.12,102.36 90 top
R83  10k  [0603]  44.2,102.36 270 top
R84  10k  [0603]  46.74,102.36 90 top
R85  10k  [0603]  51.82,102.36 90 top
R86  1k  [0603]  61.85,89.28 0 top
R87  10k  [0603]  65.02,102.36 90 top
R88  10k  [0603]  70.1,102.36 270 top
R89  10k  [0603]  72.64,102.36 90 top
R90  10k  [0603]  77.72,102.36 90 top
R91  1k  [0603]  87.76,89.28 0 top
R92  10k  [0603]  90.93,102.36 90 top
R93  10k  [0603]  96.01,102.36 270 top
R94  10k  [0603]  98.55,102.36 90 top
R95  10k  [0603]  103.63,102.36 90 top
R96  1k  [0603]  113.67,89.28 0 top
R97  10k  [0603]  116.84,102.36 90 top
R98  10k  [0603]  121.92,102.36 270 top
R99  10k  [0603]  124.46,102.36 90 top
R100  10k  [0603]  129.54,102.36 90 top
R101  1k  [0603]  10.03,115.19 0 top
R102  10k  [0603]  13.21,128.27 90 top
R103  10k  [0603]  18.29,128.27 270 top
R104  10k  [0603]  20.83,128.27 90 top
R105  10k  [0603]  25.91,128.27 90 top
R106  1k  [0603]  35.94,115.19 0 top
R107  10k  [0603]  39.12,128.27 90 top
R108  10k  [0603]  44.2,128.27 270 top
R109  10k  [0603]  46.74,128.27 90 top
R110  10k  [0603]  51.82,128.27 90 top
R111  1k  [0603]  61.85,115.19 0 top
R112  10k  [0603]  65.02,128.27 90 top
R113  10k  [0603]  70.1,128.27 270 top
R114  10k  [0603]  72.64,128.27 90 top
R115  10k  [0603]  77.72,128.27 90 top
R116  1k  [0603]  87.76,115.19 0 top
R117  10k  [0603]  90.93,128.27 90 top
R118  10k  [0603]  96.01,128.27 270 top
R119  10k  [0603]  98.55,128.27 90 top
R120  10k  [0603]  103.63,128.27 90 top
R121  1k  [0603]  113.67,115.19 0 top
R122  10k  [0603]  116.84,128.27 90 top
R123  10k  [0603]  121.92,128.27 270 top
R124  10k  [0603]  124.46,128.27 90 top
R125  10k  [0603]  129.54,128.27 90 top
R126  1k  [0603]  10.03,141.1 0 top
R127  10k  [0603]  13.21,154.18 90 top
R128  10k  [0603]  18.29,154.18 270 top
R129  10k  [0603]  20.83,154.18 90 top
R130  10k  [0603]  25.91,154.18 90 top
R131  1k  [0603]  35.94,141.1 0 top
R132  10k  [0603]  39.12,154.18 90 top
R133  10k  [0603]  44.2,154.18 270 top
R134  10k  [0603]  46.74,154.18 90 top
R135  10k  [0603]  51.82,154.18 90 top